# EAGLE board lab2h (EAGLE 9.6.2)
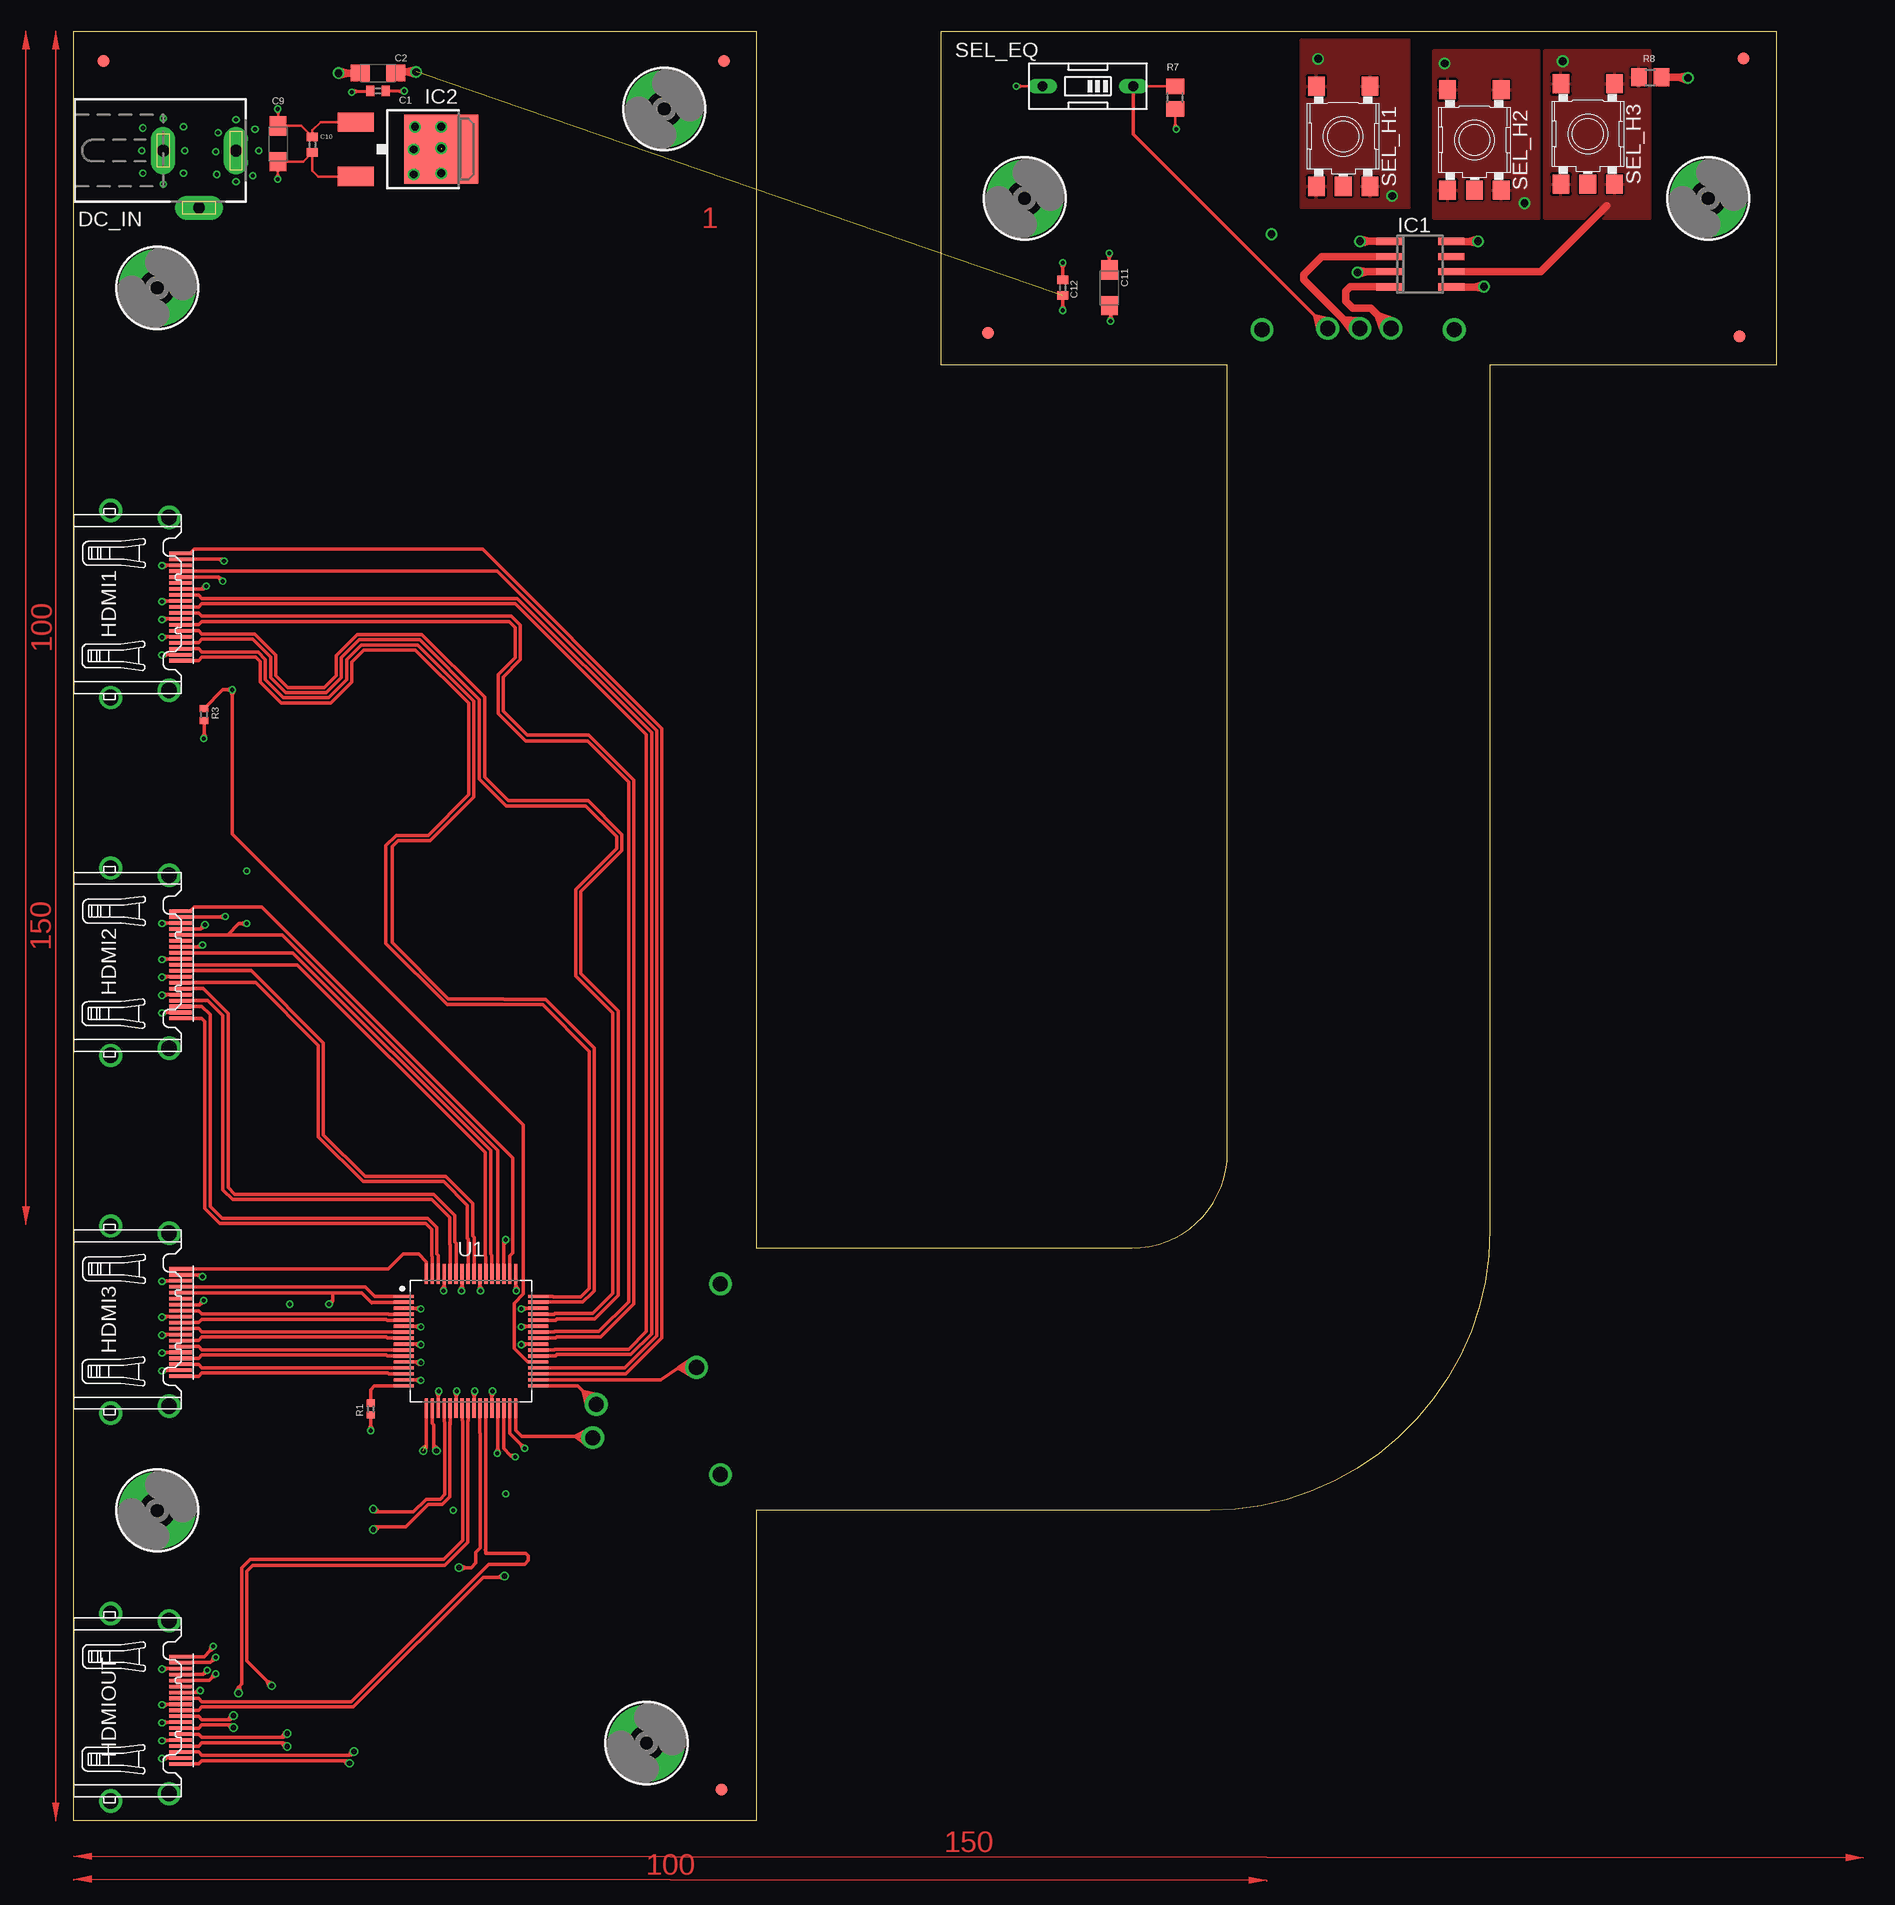
[diagram p0: board, top side]
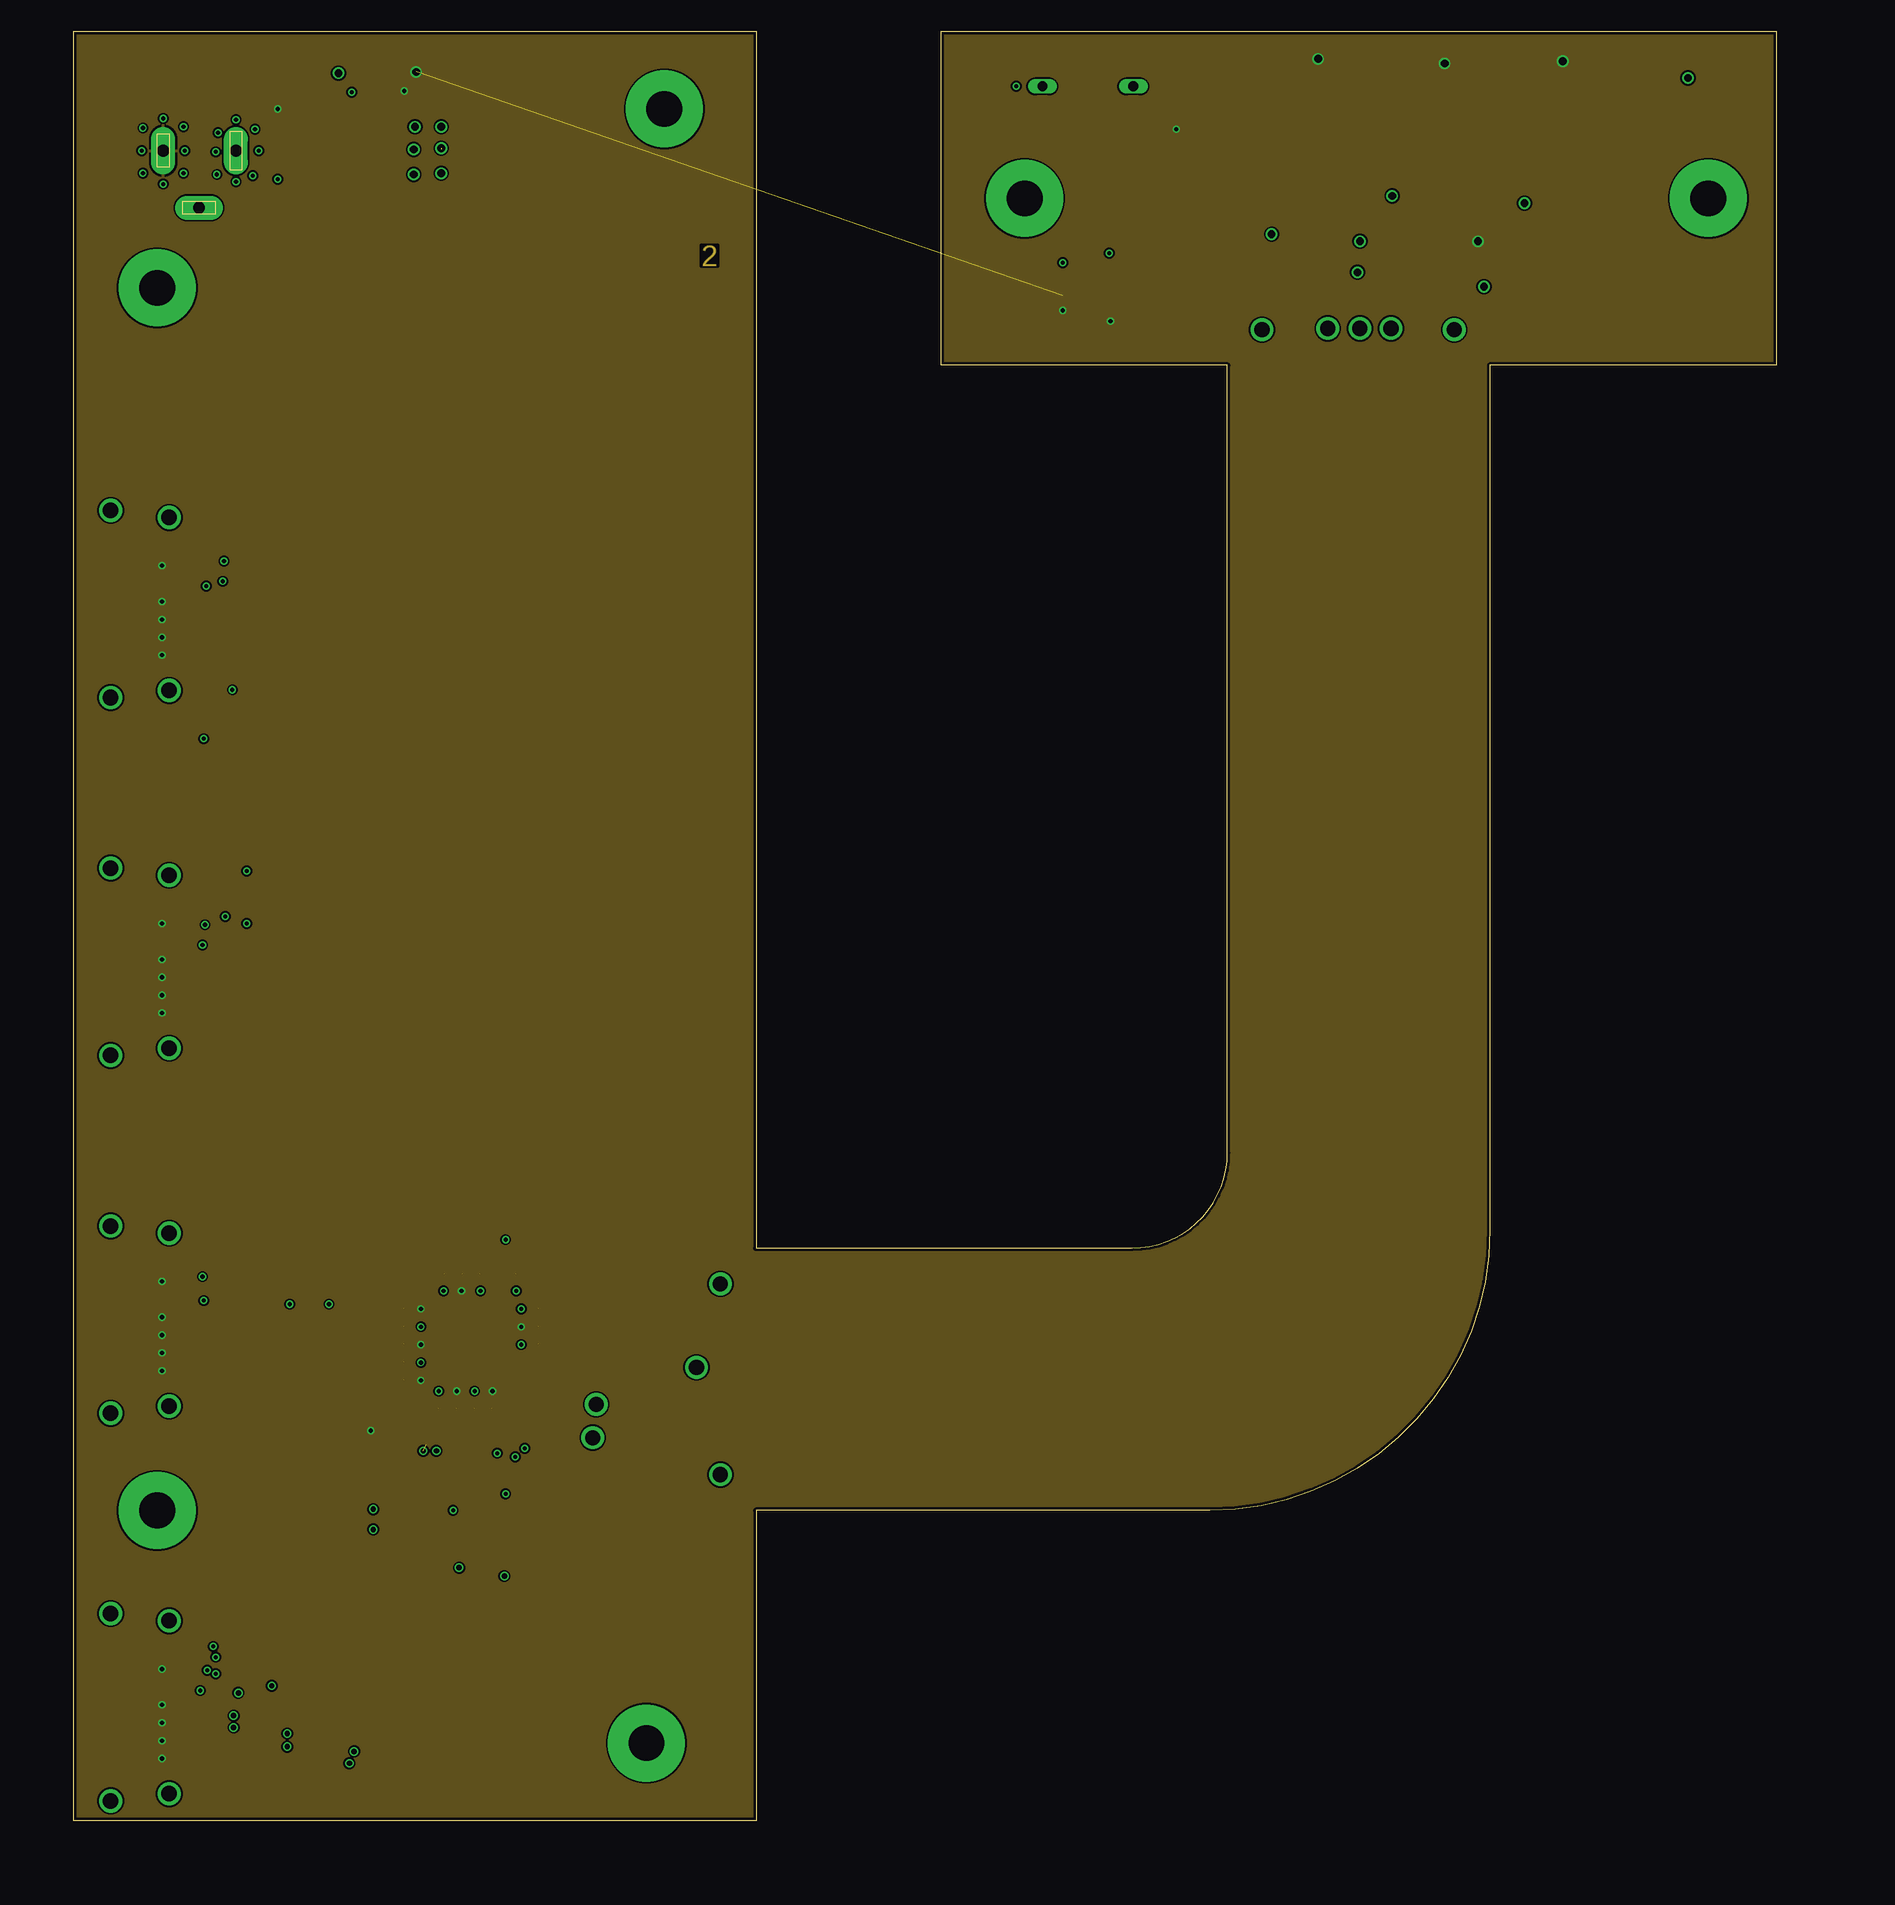
[diagram p1: board, inner layer Route2]
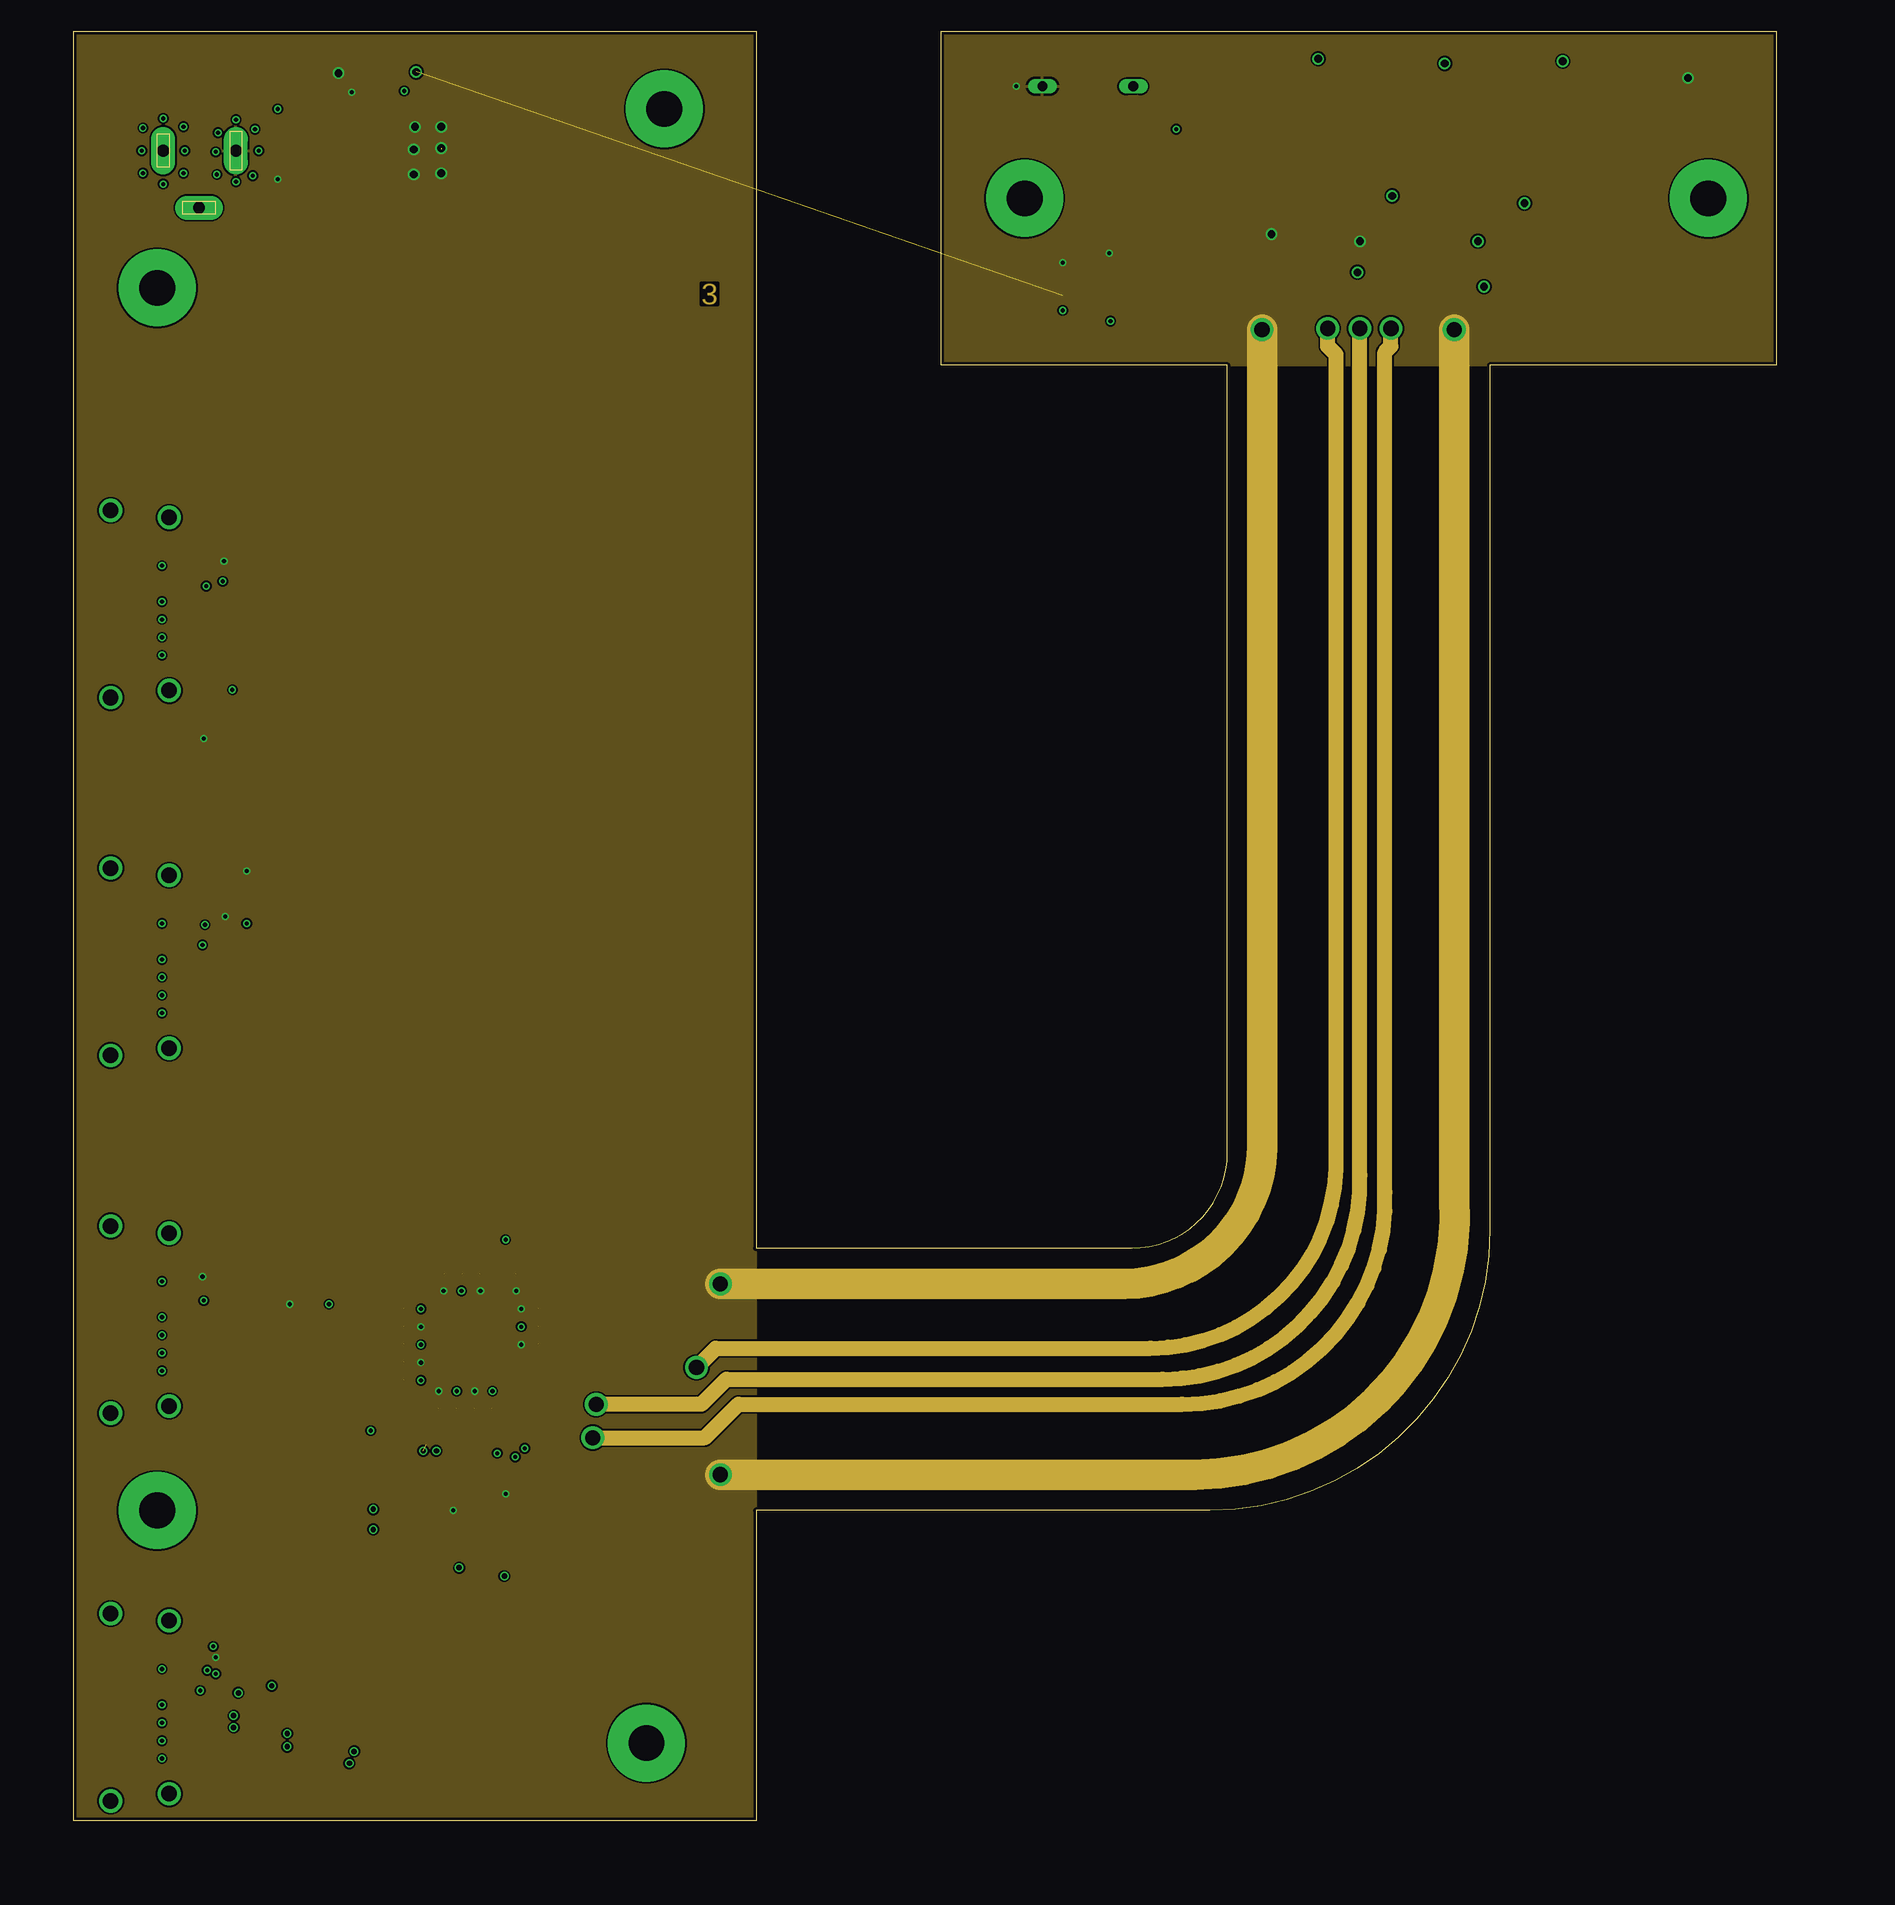
[diagram p2: board, inner layer Route15]
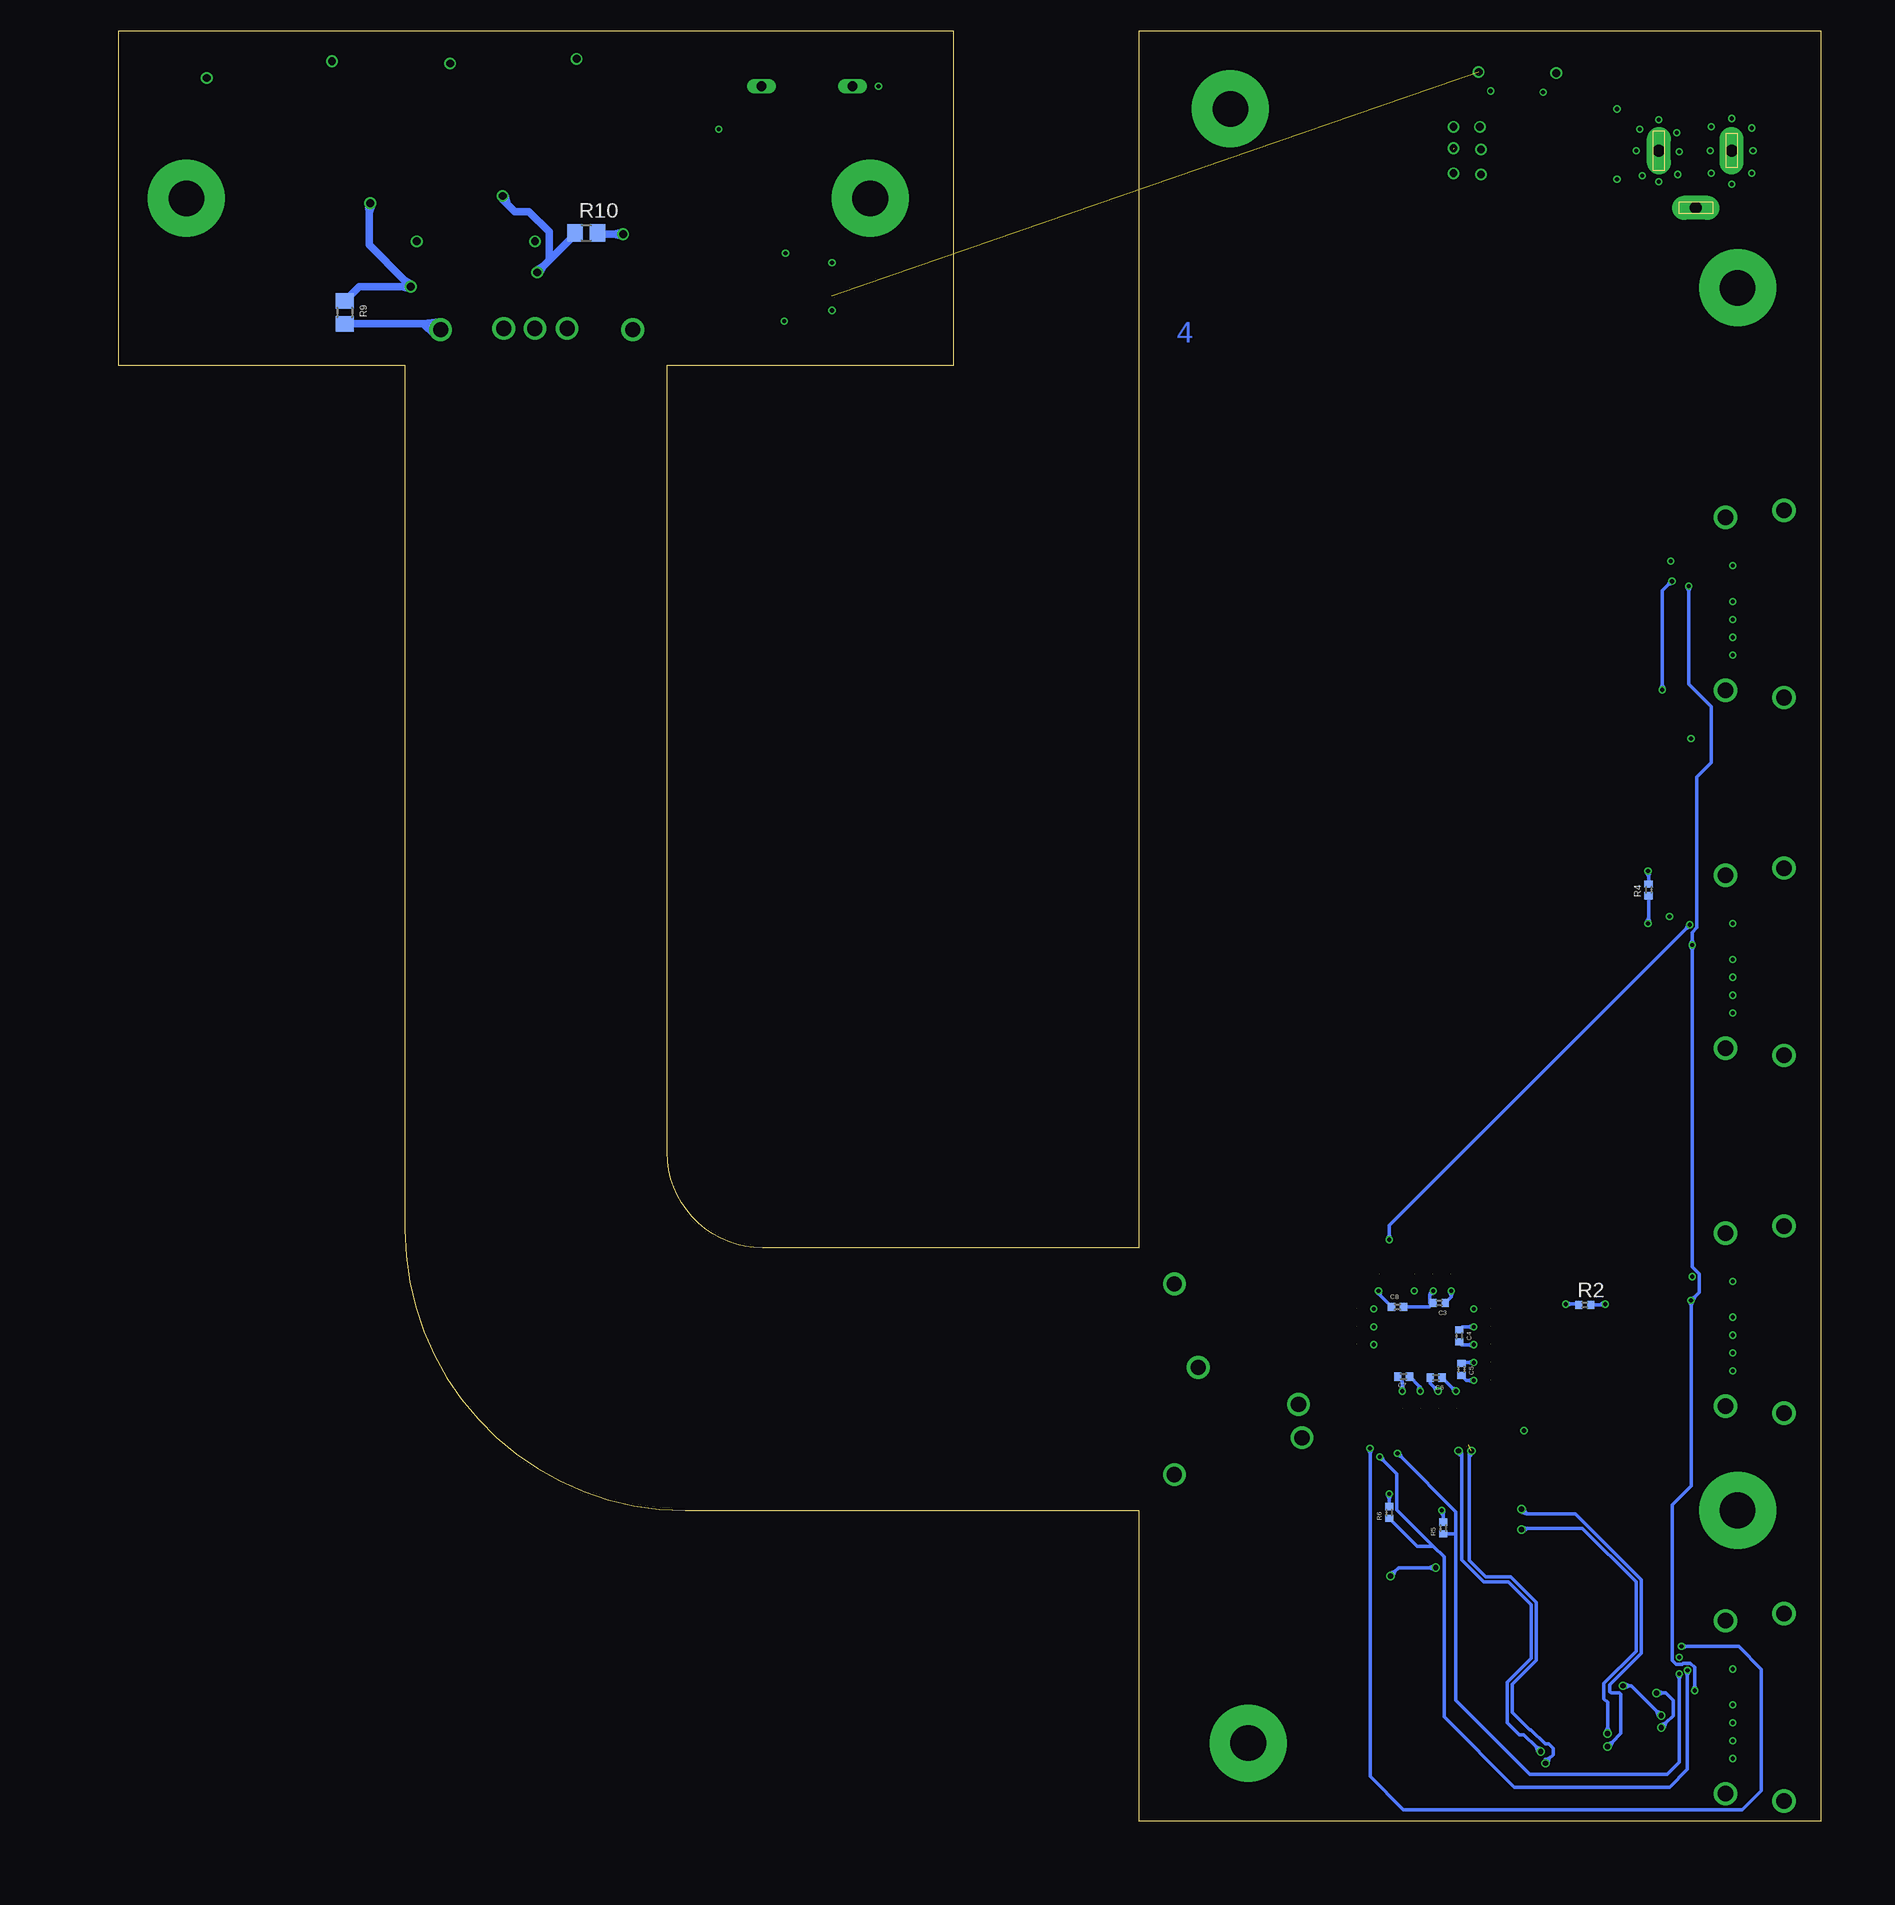
[diagram p3: board, bottom side, seen from below]

Size 142.7 x 150 mm. Coordinates in mm from the lower left corner, seen from the top.
Outline: 0,150 57.2,150 57.2,48 88.7,48 arc90 96.7,56 96.7,122 72.7,122 72.7,150 142.7,150 142.7,122 118.7,122 118.7,49.5 arc-90 95.2,26 57.2,26 57.2,0 0,0 0,150
Copper layers (1+2*15+16): Top 0.018mm / dielectric 0.36mm / Route2 0.035mm / dielectric 0.71mm / Route15 0.035mm / dielectric 0.2mm / Bottom 0.018mm
Design rules "4Layer_PClass6 (1) *": minimum track width 0.15mm, minimum drill 0.35mm, track to track 0.15mm, track to pad 0.15mm, pad to pad 0.15mm, via to via 0.15mm, smd to smd 0mil, copper to edge 0.25mm, drill to drill 0.35mm, minimum pad ring 0.175mm, minimum via ring 0.125mm, stop-mask expansion 0mil, vias tented up to drill 0.45mm, thermal gap 0.2mm
Net classes: 2 100ohm: width 0.283 mm, clearance 0.15 mm

## Footprints (pad centres in the part's own frame; a part is rotated, then mirrored left to right if it is on the bottom)
C0402 = smd 0.7 x 0.9: 1 -0.65,0; 2 0.65,0
SMC_A = smd 1.6 x 1.4: + -1.5,0; - 1.5,0
0402 = smd 0.6 x 0.7: 1 -0.5,0; 2 0.5,0
DCJ0303 = drill 1 pad 2 long: 1 0,3.1; 2 4.8,0; 3 0,-3
FIDUCIAL_1MM = smd 1 x 1: 1 0,0
HDMI_A = smd 0.3 x 1.9: P$1 4.75,3.95; P$2 4.25,3.95; P$3 3.75,3.95; P$4 3.25,3.95; P$5 2.75,3.95; P$6 2.25,3.95; P$7 1.75,3.95; P$8 1.25,3.95; P$9 0.75,3.95; P$10 0.25,3.95; P$11 -0.25,3.95; P$12 -0.75,3.95; P$13 -1.25,3.95; P$14 -1.75,3.95; P$15 -2.25,3.95; P$16 -2.75,3.95; P$17 -3.25,3.95; P$18 -3.75,3.95; P$19 -4.25,3.95 | drill 1.3: P$20 -7.25,3; P$21 7.25,3; P$22 7.85,-1.9; P$23 -7.85,-1.9
SO-08 = smd 0.6 x 2.2: 1 -1.905,-2.6; 2 -0.635,-2.6; 3 0.635,-2.6; 4 1.905,-2.6; 5 1.905,2.6; 6 0.635,2.6; 7 -0.635,2.6; 8 -1.905,2.6
DPACK = smd 1.6 x 3: 1 -2.28,-4.8; 3 2.28,-4.8 | smd 5.8 x 6.2: 4 0,2.38
R0805 = smd 1.3 x 1.5: 1 -0.95,0; 2 0.95,0
EDG-01 = drill 0.813 long: 1 0,-3.81; 2 0,3.81
SKHMPXE010 = smd 1.6 x 1.4: 1 -4.2,2.25; 2 4.2,2.25; 3 -4.2,-2.25; 4 4.2,-2.25; 5 4.2,0
QFP50P1200X1200X120-64 = smd 1.652 x 0.28: 1 -5.632,3.75; 2 -5.632,3.25; 3 -5.632,2.75; 4 -5.632,2.25; 5 -5.632,1.75; 6 -5.632,1.25; 7 -5.632,0.75; 8 -5.632,0.25; 9 -5.632,-0.25; 10 -5.632,-0.75; 11 -5.632,-1.25; 12 -5.632,-1.75; 13 -5.632,-2.25; 14 -5.632,-2.75; 15 -5.632,-3.25; 16 -5.632,-3.75; 33 5.632,-3.75; 34 5.632,-3.25; 35 5.632,-2.75; 36 5.632,-2.25; 37 5.632,-1.75; 38 5.632,-1.25; 39 5.632,-0.75; 40 5.632,-0.25; 41 5.632,0.25; 42 5.632,0.75; 43 5.632,1.25; 44 5.632,1.75; 45 5.632,2.25; 46 5.632,2.75; 47 5.632,3.25; 48 5.632,3.75 | smd 0.28 x 1.652: 17 -3.75,-5.632; 18 -3.25,-5.632; 19 -2.75,-5.632; 20 -2.25,-5.632; 21 -1.75,-5.632; 22 -1.25,-5.632; 23 -0.75,-5.632; 24 -0.25,-5.632; 25 0.25,-5.632; 26 0.75,-5.632; 27 1.25,-5.632; 28 1.75,-5.632; 29 2.25,-5.632; 30 2.75,-5.632; 31 3.25,-5.632; 32 3.75,-5.632; 49 3.75,5.632; 50 3.25,5.632; 51 2.75,5.632; 52 2.25,5.632; 53 1.75,5.632; 54 1.25,5.632; 55 0.75,5.632; 56 0.25,5.632; 57 -0.25,5.632; 58 -0.75,5.632; 59 -1.25,5.632; 60 -1.75,5.632; 61 -2.25,5.632; 62 -2.75,5.632; 63 -3.25,5.632; 64 -3.75,5.632
MOUNTINGHOLE_3.0_PLATED = drill 3 pad 6.452: P$1 0,0

## Placement (x,y rotation side)
C1  10n  [C0402]  25.5,145 0 top
C2  47u  [SMC_A]  25.5,146.5 0 top
C3  10n  [0402]  32,43.4 180 bottom
C4  10n  [0402]  30.33,40.63 270 bottom
C5  10n  [0402]  30.15,37.83 270 bottom
C6  10n  [0402]  32.27,37.13 180 bottom
C7  10n  [0402]  34.99,37.23 180 bottom
C8  100n  [0402]  35.5,43.07 0 bottom
C9  47u  [SMC_A]  17.13,140.57 90 top
C10  100n  [C0402]  20,140.5 90 top
C11  47u  [SMC_A]  86.8,128.5 270 top
C12  100n  [C0402]  82.9,128.5 270 top
DC_IN  [DCJ0303]  10.5,140 270 top
FID1  FIDUCIAL""  [FIDUCIAL_1MM]  139.94,147.74 0 top
FID2  FIDUCIAL""  [FIDUCIAL_1MM]  139.6,124.44 0 top
FID3  FIDUCIAL""  [FIDUCIAL_1MM]  54.3,2.6 90 top
FID4  FIDUCIAL""  [FIDUCIAL_1MM]  54.5,147.5 0 top
FID5  FIDUCIAL""  [FIDUCIAL_1MM]  2.5,147.5 0 top
FID6  FIDUCIAL""  [FIDUCIAL_1MM]  76.64,124.74 0 top
HDMI1  HDMI-A  [HDMI_A]  5,102 270 top
HDMI2  HDMI-A  [HDMI_A]  5,72 270 top
HDMI3  HDMI-A  [HDMI_A]  5,42 270 top
HDMIOUT  HDMI-A  [HDMI_A]  5,9.5 270 top
IC1  PIC12F675SN  [SO-08]  112.85,130.48 270 top
IC2  LD117ADT-TR  [DPACK]  28.44,140.12 270 top
R1  4k02  [0402]  24.9,34.5 90 top
R2  47k  [0402]  19.81,43.23 0 bottom
R3  47k  [0402]  10.93,92.73 270 top
R4  47k  [0402]  14.45,78.03 90 bottom
R5  4k7  [0402]  31.67,24.53 90 bottom
R6  4k7  [0402]  36.19,25.83 90 bottom
R7  [R0805]  92.31,144.44 90 top
R8  [R0805]  132.13,146.14 0 top
R9  [R0805]  123.75,126.44 270 bottom
R10  [R0805]  103.5,133.1 0 bottom
SEL_EQ  [EDG-01]  85,145.4 90 top
SEL_H1  SKHMPSE010  [SKHMPXE010]  106.4,141.2 270 top
SEL_H2  SKHMPSE010  [SKHMPXE010]  117.4,140.9 270 top
SEL_H3  SKHMPSE010  [SKHMPXE010]  126.9,141.4 270 top
U1  TMDS351TQFP64  [QFP50P1200X1200X120-64]  33.3,40.2 0 top
U$1  MOUNTINGHOLE3.0  [MOUNTINGHOLE_3.0_PLATED]  79.7,136 0 top
U$2  MOUNTINGHOLE3.0  [MOUNTINGHOLE_3.0_PLATED]  137,136 0 top
U$31  MOUNTINGHOLE3.0  [MOUNTINGHOLE_3.0_PLATED]  49.5,143.5 0 top
U$32  MOUNTINGHOLE3.0  [MOUNTINGHOLE_3.0_PLATED]  7,128.5 0 top
U$33  MOUNTINGHOLE3.0  [MOUNTINGHOLE_3.0_PLATED]  7,26 0 top
U$34  MOUNTINGHOLE3.0  [MOUNTINGHOLE_3.0_PLATED]  48,6.5 0 top

## Library data of the parts
C1 C2 C9-C12 = rcl; SPICEPREFIX: C
C3-C8 HDMI1-HDMI3 HDMIOUT R1-R6 U1 = labHDE_rev3
DC_IN = con-jack; OC_FARNELL: unknown; OC_NEWARK: unknown
FID1-FID6 U$1 U$2 U$31-U$34 = microbuilder; BOM: EXCLUDE
IC1 = microchip; MF: MICROCHIP; MPN: PIC12F675-E/SN; OC_FARNELL: 9759026; OC_NEWARK: 92C4341
IC2 = v-reg
R7-R10 = rcl; SPICEPREFIX: R
SEL_EQ = special
SEL_H1-SEL_H3 = switch

## Nets
+5V: C8.1 C9.+ C10.1 DC_IN.1 HDMI1.P$18 HDMI2.P$18 HDMI3.P$18 HDMIOUT.P$18 IC2.3 R2.2 R3.2 R4.2 U1.49
CEC: HDMI1.P$13 HDMI2.P$13 HDMI3.P$13 HDMIOUT.P$13
CLOCK_1_N [100ohm]: HDMI1.P$12 U1.38
CLOCK_1_P [100ohm]: HDMI1.P$10 U1.39
CLOCK_2_N [100ohm]: HDMI2.P$12 U1.53
CLOCK_2_P [100ohm]: HDMI2.P$10 U1.54
CLOCK_3_N [100ohm]: HDMI3.P$12 U1.4
CLOCK_3_P [100ohm]: HDMI3.P$10 U1.5
CLOCK_OUT_N [100ohm]: HDMIOUT.P$12 U1.27
CLOCK_OUT_P [100ohm]: HDMIOUT.P$10 U1.26
DATA0_1_N [100ohm]: HDMI1.P$9 U1.41
DATA0_1_P [100ohm]: HDMI1.P$7 U1.42
DATA0_2_N [100ohm]: HDMI2.P$9 U1.56
DATA0_2_P [100ohm]: HDMI2.P$7 U1.57
DATA0_3_N [100ohm]: HDMI3.P$9 U1.7
DATA0_3_P [100ohm]: HDMI3.P$7 U1.8
DATA0_OUT_N [100ohm]: HDMIOUT.P$9 U1.24
DATA0_OUT_P [100ohm]: HDMIOUT.P$7 U1.23
DATA1_1_N [100ohm]: HDMI1.P$6 U1.44
DATA1_1_P [100ohm]: HDMI1.P$4 U1.45
DATA1_2_N [100ohm]: HDMI2.P$6 U1.59
DATA1_2_P [100ohm]: HDMI2.P$4 U1.60
DATA1_3_N [100ohm]: HDMI3.P$6 U1.10
DATA1_3_P [100ohm]: HDMI3.P$4 U1.11
DATA1_OUT_N [100ohm]: HDMIOUT.P$6 U1.21
DATA1_OUT_P [100ohm]: HDMIOUT.P$4 U1.20
DATA2_1_N [100ohm]: HDMI1.P$3 U1.47
DATA2_1_P [100ohm]: HDMI1.P$1 U1.48
DATA2_2_N [100ohm]: HDMI2.P$3 U1.62
DATA2_2_P [100ohm]: HDMI2.P$1 U1.63
DATA2_3_N [100ohm]: HDMI3.P$3 U1.13
DATA2_3_P [100ohm]: HDMI3.P$1 U1.14
DATA2_OUT_N [100ohm]: HDMIOUT.P$3 U1.18
DATA2_OUT_P [100ohm]: HDMIOUT.P$1 U1.17
EQ: R7.2 SEL_EQ.1 U1.34
GND: C1.2 C2.- C3.2 C4.2 C5.2 C6.2 C7.2 C8.2 C9.- C10.2 C11.- C12.2 DC_IN.3 HDMI1.P$2 HDMI1.P$5 HDMI1.P$8 HDMI1.P$11 HDMI1.P$17 HDMI2.P$2 HDMI2.P$5 HDMI2.P$8 HDMI2.P$11 HDMI2.P$17 HDMI3.P$2 HDMI3.P$5 HDMI3.P$8 HDMI3.P$11 HDMI3.P$17 HDMIOUT.P$2 HDMIOUT.P$5 HDMIOUT.P$8 HDMIOUT.P$11 HDMIOUT.P$17 IC1.8 IC2.1 R1.1 R7.1 SEL_H1.3 SEL_H1.4 SEL_H2.3 SEL_H2.4 SEL_H3.3 SEL_H3.4 U1.3 U1.9 U1.15 U1.22 U1.28 U1.43 U1.58
N$25: HDMI3.P$19 U1.64
N$26: HDMI2.P$19 U1.50
N$27: HDMI1.P$19 U1.35
N$36: HDMIOUT.P$19 U1.31
N$37: HDMI3.P$16 U1.1
N$38: HDMI3.P$15 R2.1 U1.2
N$39: HDMI2.P$16 U1.51
N$40: HDMI2.P$15 R4.1 U1.52
N$41: HDMI1.P$15 R3.1 U1.37
N$42: HDMI1.P$16 U1.36
N$43: HDMIOUT.P$16 R6.1 U1.30
N$44: HDMIOUT.P$15 R5.1 U1.29
N$45: R1.2 U1.16
N$50: IC1.6 R8.1 SEL_H3.1 SEL_H3.2
N$51: IC1.5 R9.1 SEL_H2.1 SEL_H2.2
N$52: IC1.3 R10.1 SEL_H1.1 SEL_H1.2
S1: IC1.4 U1.32
S2: IC1.2 U1.33
VCC: C1.1 C2.+ C3.1 C4.1 C5.1 C6.1 C7.1 C11.+ C12.1 IC1.1 IC2.4 R5.2 R6.2 R8.2 R9.2 R10.2 SEL_EQ.2 U1.6 U1.12 U1.19 U1.25 U1.40 U1.46 U1.55 U1.61

## Tracks (layer width: path | path; a pad name or v marks a point on that pad's centre or on a via)
+5V  (via drill 0.35)  (1 unrouted)
  Top 0.203: IC2.3 23.6,137.8 20.5,137.8 20,138.3 C10.1 19.22,139.07 C9.+ 17.1,139.04 17.1,138.02 | v17.1,137.6 17.1,138.02 | 17.1,138.02 16.93,137.69 v17.1,137.6 | 17.1,138.02 17.27,137.69 v17.1,137.6
  Top 0.283: U1.49 37.05,44.82 | 37.05,44.82 37.05,44.45 v37.1,44.4 | HDMI3.P$18 10.41,45.75 | 10.41,45.75 10.65,45.75 v10.8,45.6 | HDMIOUT.P$18 11.45,13.25 11.6,13.4 | 11.6,13.4 v11.9,13.7 | HDMI2.P$18 12.28,75.75 | 12.28,75.75 12.65,75.75 v12.7,75.8 | HDMI1.P$18 12.21,105.75 | 12.21,105.75 12.45,105.75 v12.6,105.6 | v10.9,90.7 10.93,90.73 10.93,91.12 | R3.2 10.93,91.12 | 37.05,44.82 36.95,44.44 v37.1,44.4 | 37.05,44.82 37.24,44.48 v37.1,44.4 | 10.41,45.75 10.69,45.48 v10.8,45.6 | 10.41,45.75 10.8,45.76 v10.8,45.6 | 11.6,13.4 11.96,13.55 v11.9,13.7 | 11.6,13.4 11.75,13.76 v11.9,13.7 | 12.28,75.75 12.66,75.65 v12.7,75.8 | 12.28,75.75 12.62,75.94 v12.7,75.8 | 12.21,105.75 12.49,105.48 v12.6,105.6 | 12.21,105.75 12.6,105.76 v12.6,105.6 | 10.93,91.12 10.76,90.77 v10.9,90.7 | 10.93,91.12 11.05,90.75 v10.9,90.7
  Bottom 0.283: v37.1,44.4 37.1,44.17 36.94,44.01 | 36.94,44.01 C8.1 | R2.2 18.51,43.23 | 18.51,43.23 18.17,43.23 v18.1,43.3 | R4.2 14.45,79.18 | 14.45,79.18 14.45,79.55 v14.5,79.6 | 36.94,44.01 37.21,44.29 v37.1,44.4 | 36.94,44.01 36.94,44.4 v37.1,44.4 | 18.51,43.23 18.18,43.44 v18.1,43.3 | 18.51,43.23 18.14,43.15 v18.1,43.3 | 14.45,79.18 14.64,79.52 v14.5,79.6 | 14.45,79.18 14.35,79.56 v14.5,79.6
  pour Route15: 0,150 0,0 57.2,0 57.2,150
CEC  (via drill 0.35)
  Top 0.283: HDMI1.P$13 10.76,103.25 | 10.76,103.25 10.85,103.25 v11.1,103.5 | HDMI2.P$13 10.41,73.25 | 10.41,73.25 10.65,73.25 v10.8,73.4 | HDMI3.P$13 10.55,43.25 10.6,43.3 | 10.6,43.3 v10.9,43.6 | HDMIOUT.P$13 10.21,10.75 | 10.21,10.75 10.45,10.75 v10.6,10.9 | 10.21,10.75 10.6,10.74 v10.6,10.9 | 10.21,10.75 10.49,11.02 v10.6,10.9 | 10.6,43.3 10.96,43.45 v10.9,43.6 | 10.6,43.3 10.75,43.66 v10.9,43.6 | 10.41,73.25 10.8,73.24 v10.8,73.4 | 10.41,73.25 10.69,73.52 v10.8,73.4 | 10.76,103.25 11.14,103.35 v11.1,103.5 | 10.76,103.25 10.96,103.58 v11.1,103.5
  Bottom 0.283: 10.9,43.18 10.9,28.05 12.49,26.46 12.49,13.46 12.14,13.11 11.65,13.11 11.57,13.19 10.96,13.19 10.6,12.84 10.6,11.32 | 10.9,43.18 v10.9,43.6 | v10.6,10.9 10.6,11.32 | 10.8,72.98 10.8,46.44 10.21,45.84 10.21,44.29 10.6,43.9 | 10.8,72.98 v10.8,73.4 | v10.9,43.6 10.6,43.9 | v10.8,73.4 10.8,73.82 | 10.8,73.82 10.8,74.46 10.41,74.86 10.41,87.49 9.2,88.7 9.2,93.4 11.1,95.3 11.1,103.08 | v11.1,103.5 11.1,103.08 | 10.6,11.32 10.45,10.96 v10.6,10.9 | 10.6,11.32 10.75,10.96 v10.6,10.9 | 10.9,43.18 11.05,43.54 v10.9,43.6 | 10.9,43.18 10.75,43.54 v10.9,43.6 | 10.6,43.9 10.75,43.54 v10.9,43.6 | 10.6,43.9 10.96,43.75 v10.9,43.6 | 10.8,72.98 10.95,73.34 v10.8,73.4 | 10.8,72.98 10.65,73.34 v10.8,73.4 | 10.8,73.82 10.65,73.46 v10.8,73.4 | 10.8,73.82 10.95,73.46 v10.8,73.4 | 11.1,103.08 11.25,103.44 v11.1,103.5 | 11.1,103.08 10.95,103.44 v11.1,103.5
CLOCK_1_N
  Top 0.283: HDMI1.P$12 10.47,102.75 10.75,102.47 37.18,102.47 48.43,91.21 48.43,40.82 46.68,39.07 40.5,39.07 40.38,38.95 U1.38
CLOCK_1_P
  Top 0.283: HDMI1.P$10 10.47,101.75 10.75,102.03 37,102.03 48,91.03 48,41 46.5,39.5 40.32,39.5 40.27,39.45 U1.39
CLOCK_2_N
  Top 0.283: HDMI2.P$12 18.36,72.75 34.93,56.18 34.93,47.5 35.05,47.38 U1.53
CLOCK_2_P
  Top 0.283: HDMI2.P$10 18.75,71.75 34.5,56 34.5,47.32 34.55,47.27 U1.54
CLOCK_3_N
  Top 0.283: HDMI3.P$12 10.47,42.75 10.75,42.47 26.38,42.47 26.4,42.45 U1.4
CLOCK_3_P
  Top 0.283: HDMI3.P$10 10.47,41.75 10.75,42.03 26.2,42.03 26.28,41.95 U1.5
CLOCK_OUT_N
  Top 0.283: HDMIOUT.P$12 10.47,10.25 10.75,9.97 23.27,9.97 34.8,21.5 37.8,21.5 38.1,21.8 38.1,22.2 37.89,22.41 34.52,22.41 34.52,22.71 | U1.27 34.55,32.89 34.52,32.85 34.52,22.71 | 34.51,22.7 34.52,22.71
CLOCK_OUT_P  (via drill 0.45)
  Top 0.283: HDMIOUT.P$10 10.47,9.25 10.75,9.53 23.45,9.53 34.31,20.39 35.57,20.39 | 35.57,20.39 35.99,20.39 v36.1,20.5 | v32.3,21.2 32.84,21.2 | 32.84,21.2 33.3,21.2 33.7,21.6 33.7,22.5 34.08,22.89 34.08,32.48 34.05,32.51 U1.26 | 35.57,20.39 36.06,20.3 v36.1,20.5 | 35.57,20.39 35.98,20.67 v36.1,20.5 | 32.84,21.2 32.38,21.39 v32.3,21.2 | 32.84,21.2 32.38,21.01 v32.3,21.2
  Bottom 0.283: 35.72,20.88 35.4,21.2 32.84,21.2 | 35.72,20.88 v36.1,20.5 | v32.3,21.2 32.84,21.2 | 35.72,20.88 35.91,20.42 v36.1,20.5 | 35.72,20.88 36.18,20.69 v36.1,20.5 | 32.84,21.2 32.38,21.39 v32.3,21.2 | 32.84,21.2 32.38,21.01 v32.3,21.2
DATA0_1_N
  Top 0.283: HDMI1.P$9 10.47,101.25 10.75,100.97 36.68,100.97 37.43,100.21 37.43,97.32 36,95.89 36,93 38,91 43.18,91 46.93,87.25 46.93,43.32 44.18,40.57 40.5,40.57 40.38,40.45 U1.41
DATA0_1_P
  Top 0.283: HDMI1.P$7 10.47,100.25 10.75,100.53 36.5,100.53 37,100.03 37,97.5 35.57,96.07 35.57,92.82 37.89,90.5 43.07,90.5 46.5,87.07 46.5,43.5 44,41 40.32,41 40.27,40.95 U1.42
DATA0_2_N
  Top 0.283: HDMI2.P$9 14.86,71.25 20.93,65.18 20.93,57.5 24.43,54 31.18,54 33.43,51.75 33.43,49 33.55,48.88 U1.56
DATA0_2_P
  Top 0.283: HDMI2.P$7 15.25,70.25 20.5,65 20.5,57.32 24.25,53.57 31,53.57 33,51.57 33,48.82 33.05,48.77 U1.57
DATA0_3_N
  Top 0.283: HDMI3.P$9 10.47,41.25 10.75,40.97 26.38,40.97 26.4,40.95 U1.7
DATA0_3_P
  Top 0.283: HDMI3.P$7 10.47,40.25 10.75,40.53 26.2,40.53 26.28,40.45 U1.8
DATA0_OUT_N  (via drill 0.45)
  Top 0.283: HDMIOUT.P$9 10.47,8.75 10.75,8.47 12.97,8.47 | v13.4,8.8 13.07,8.47 12.97,8.47 | U1.24 33.05,33.52 33.03,33.5 33.03,23.32 31.11,21.4 15,21.4 14.52,20.92 14.52,13.38 16.22,11.68 | v16.6,11.3 16.22,11.68 | 12.97,8.47 13.46,8.6 v13.4,8.8 | 12.97,8.47 13.22,8.9 v13.4,8.8 | 16.22,11.68 16.41,11.22 v16.6,11.3 | 16.22,11.68 16.68,11.49 v16.6,11.3
  Bottom 0.283: v13.4,8.8 13.78,9.18 | 13.78,9.18 15.9,11.3 16.06,11.3 | 16.06,11.3 v16.6,11.3 | 13.78,9.18 13.32,8.99 v13.4,8.8 | 13.78,9.18 13.59,8.72 v13.4,8.8 | 16.06,11.3 16.52,11.11 v16.6,11.3 | 16.06,11.3 16.52,11.49 v16.6,11.3
DATA0_OUT_P  (via drill 0.45)
  Top 0.283: HDMIOUT.P$7 10.47,7.75 10.75,8.03 12.91,8.03 | v13.4,7.8 13.17,8.03 12.91,8.03 | U1.23 32.55,33.55 32.6,33.5 32.6,23.5 31,21.9 14.8,21.9 14.08,21.18 14.08,11.46 13.86,11.24 | 13.86,11.24 13.8,11.18 v13.8,10.7 | 12.91,8.03 13.24,7.66 v13.4,7.8 | 12.91,8.03 13.41,8.01 v13.4,7.8 | 13.86,11.24 13.62,10.8 v13.8,10.7 | 13.86,11.24 14,10.76 v13.8,10.7
  Bottom 0.283: v13.4,7.8 13.02,8.18 | 13.02,8.18 12.4,8.8 12.4,10.1 13,10.7 13.26,10.7 | 13.26,10.7 v13.8,10.7 | 13.02,8.18 13.21,7.72 v13.4,7.8 | 13.02,8.18 13.48,7.99 v13.4,7.8 | 13.26,10.7 13.72,10.51 v13.8,10.7 | 13.26,10.7 13.72,10.89 v13.8,10.7
DATA1_1_N
  Top 0.283: HDMI1.P$6 10.47,99.75 10.75,99.47 15.18,99.47 16.93,97.71 16.93,96 17.93,95 21,95 22,96 22,97.68 23.75,99.43 29.18,99.43 34.43,94.18 34.43,87.5 36.43,85.5 43.11,85.5 45.81,82.81 | 45.81,82.81 | 45.81,82.81 45.93,82.68 45.93,81.32 45.81,81.19 | 45.81,81.19 | 45.5,68 42.5,71 42.5,77.89 45.81,81.19 | 45.5,68 | 45.5,68 45.63,67.87 45.63,44.01 45.5,43.89 | 45.5,43.89 | 45.5,43.89 43.68,42.07 40.5,42.07 40.38,41.95 U1.44
DATA1_1_P
  Top 0.283: HDMI1.P$4 10.47,98.75 10.75,99.03 15,99.03 16.5,97.53 16.5,95.82 17.75,94.57 21.18,94.57 22.43,95.82 22.43,97.5 23.93,99 29,99 34,94 34,87.32 36.25,85.07 42.93,85.07 45.5,82.5 45.5,81.5 42.07,78.07 42.07,70.82 45.19,67.69 45.19,44.19 43.5,42.5 40.32,42.5 40.27,42.45 U1.45
DATA1_2_N
  Top 0.283: HDMI2.P$6 10.86,69.75 12.93,67.68 12.93,53.07 13.5,52.5 30.18,52.5 31.93,50.75 31.93,48.5 32.05,48.38 U1.59
DATA1_2_P
  Top 0.283: HDMI2.P$4 11.25,68.75 12.5,67.5 12.5,54.07 12.5,52.89 13.32,52.07 30,52.07 31.5,50.57 31.5,48.32 31.55,48.27 U1.60
DATA1_3_N
  Top 0.283: HDMI3.P$6 10.47,39.75 10.75,39.47 26.38,39.47 26.4,39.45 U1.10
DATA1_3_P
  Top 0.283: HDMI3.P$4 10.47,38.75 10.75,39.03 26.2,39.03 26.28,38.95 U1.11
DATA1_OUT_N  (via drill 0.45)
  Top 0.283: HDMIOUT.P$6 10.47,7.25 10.75,6.97 17.48,6.97 | v17.9,7.3 17.57,6.97 17.48,6.97 | v25.1,24.4 25.33,24.63 25.59,24.63 | 31.53,33.2 31.53,27.15 30.88,26.5 29.71,26.5 27.85,24.63 25.59,24.63 | 31.53,33.2 31.53,33.4 | 31.53,33.2 31.55,33.22 U1.21 | 17.48,6.97 17.95,7.1 v17.9,7.3 | 17.48,6.97 17.72,7.4 v17.9,7.3 | 25.59,24.63 25.09,24.61 v25.1,24.4 | 25.59,24.63 25.26,24.26 v25.1,24.4
  Bottom 0.283: v17.9,7.3 17.9,7.84 | 17.9,7.84 17.9,9.9 18.2,10.2 18.2,11.51 15.51,14.21 15.51,20.01 20,24.5 24.57,24.5 | v25.1,24.4 25,24.5 24.57,24.5 | 17.9,7.84 17.71,7.38 v17.9,7.3 | 17.9,7.84 18.09,7.38 v17.9,7.3 | 24.57,24.5 24.98,24.23 v25.1,24.4 | 24.57,24.5 25.06,24.6 v25.1,24.4
DATA1_OUT_P  (via drill 0.45)
  Top 0.283: HDMIOUT.P$4 10.47,6.25 10.75,6.53 17.48,6.53 | v17.9,6.2 17.57,6.53 17.48,6.53 | v25.1,26.1 25.33,25.87 25.59,25.87 | 25.59,25.87 28.47,25.87 29.53,26.93 30.7,26.93 31.1,27.33 31.1,33.4 31.05,33.45 U1.20 | 17.48,6.53 17.72,6.1 v17.9,6.2 | 17.48,6.53 17.95,6.4 v17.9,6.2 | 25.59,25.87 25.26,26.24 v25.1,26.1 | 25.59,25.87 25.09,25.89 v25.1,26.1
  Bottom 0.283: v25.1,26.1 24.84,25.84 24.83,25.84 24.73,25.73 24.7,25.73 | 24.7,25.73 20.62,25.73 15.2,20.31 | v17.9,6.2 17.52,6.58 | 17.52,6.58 16.8,7.3 16.8,10.6 16.9,10.7 17.6,10.7 17.7,10.8 17.7,11.4 15.2,13.9 | 15.2,13.9 | 15.2,13.9 15.07,14.03 15.07,20.19 15.2,20.31 | 15.2,20.31 | 17.52,6.58 17.71,6.12 v17.9,6.2 | 17.52,6.58 17.98,6.39 v17.9,6.2 | 24.7,25.73 25.17,25.9 v25.1,26.1 | 24.7,25.73 24.91,26.19 v25.1,26.1
DATA2_1_N
  Top 0.283: HDMI1.P$3 10.47,98.25 10.75,97.97 15.46,97.97 16.07,97.35 16.07,95.64 17.57,94.13 21.36,94.13 22.87,95.64 22.87,97.32 24.11,98.57 28.82,98.57 33.53,93.86 33.53,85.82 29.88,82.17 27.2,82.17 26.7,81.67 26.7,73.6 31.4,68.9 36,68.9 36.07,68.83 39.58,68.83 43.63,64.78 43.63,44.42 43.41,44.19 | 43.41,44.19 | 43.41,44.19 42.68,43.47 38.95,43.47 U1.47
DATA2_1_P
  Top 0.283: HDMI1.P$1 10.47,97.25 10.75,97.53 15.28,97.53 15.63,97.17 15.63,95.46 17.39,93.7 21.54,93.7 23.3,95.46 23.3,97.14 24.29,98.13 28.64,98.13 33.1,93.67 33.1,86 29.7,82.6 27.02,82.6 26.17,81.75 26.17,73.52 31.29,68.4 39.3,68.4 43.2,64.5 43.2,44.6 42.5,43.9 40.2,43.9 40.15,43.95 U1.48
DATA2_2_N
  Top 0.283: U1.62 30.55,47.38 30.43,47.5 30.43,49.75 29.68,50.5 12.43,50.5 11.43,51.5 11.43,67.57 10.75,68.25 HDMI2.P$3
DATA2_2_P
  Top 0.283: U1.63 30.05,47.27 30,47.32 30,49.57 29.5,50.07 12.25,50.07 11,51.32 11,67 10.75,67.25 HDMI2.P$1
DATA2_3_N
  Top 0.283: HDMI3.P$3 10.47,38.25 10.75,37.97 26.48,37.97 26.5,37.95 U1.13
DATA2_3_P
  Top 0.283: HDMI3.P$1 10.47,37.25 10.75,37.53 26.3,37.53 26.38,37.45 U1.14
DATA2_OUT_N  (via drill 0.45)
  Top 0.283: HDMIOUT.P$3 10.47,5.75 10.75,5.47 23.07,5.47 | v30.4,31 30.17,31.23 30.17,31.49 | U1.18 30.05,33.3 30.17,33.18 30.17,31.49 | 23.07,5.47 23.55,5.6 v23.5,5.8 23.32,5.9 23.07,5.47 | 30.17,31.49 30.19,30.99 v30.4,31 | 30.17,31.49 30.54,31.16 v30.4,31
  Bottom 0.283: v23.5,5.8 23.88,6.18 | 23.88,6.18 24.9,7.2 25.3,7.2 26.3,8.2 26.3,11.61 24.3,13.61 24.3,18.1 26.2,20 28.28,20 30.13,21.85 30.13,30.53 | v30.4,31 30.14,30.74 30.14,30.73 30.13,30.73 30.13,30.53 | 23.88,6.18 23.42,5.99 v23.5,5.8 | 23.88,6.18 23.69,5.72 v23.5,5.8 | 30.13,30.53 30.53,30.84 v30.4,31 | 30.13,30.53 30.19,31.02 v30.4,31
DATA2_OUT_P  (via drill 0.45)  (1 unrouted)
  Top 0.283: HDMIOUT.P$1 10.47,4.75 10.75,5.03 22.61,5.03 | v23.1,4.8 22.87,5.03 22.61,5.03 | v29.3,31 29.53,31.23 29.53,31.49 | 29.55,31.49 U1.17 | 22.61,5.03 22.94,4.66 v23.1,4.8 | 22.61,5.03 23.11,5.01 v23.1,4.8 | 29.53,31.49 29.16,31.16 v29.3,31 | 29.53,31.49 29.51,30.99 v29.3,31
  Bottom 0.283: v23.1,4.8 23.1,5.16 22.83,5.16 22.77,5.22 | 22.77,5.22 22.46,5.53 22.46,6.07 22.83,6.44 23.13,6.44 24.32,7.63 24.43,7.63 25.87,9.07 25.87,11.43 23.87,13.43 23.87,18.28 26.02,20.43 28.1,20.43 29.5,21.83 29.5,30.5 | v29.3,31 29.5,30.8 29.5,30.5 | 22.77,5.22 22.9,4.75 v23.1,4.8 | 22.77,5.22 23.2,4.98 v23.1,4.8 | 29.5,30.5 29.51,31 v29.3,31 | 29.5,30.5 29.15,30.85 v29.3,31
EQ  (via drill 1.27)
  Top 0.203: R7.2 SEL_EQ.1
  Top 0.283: v52.2,38 52.15,37.95 50.68,37.95 | U1.34 49.2,36.95 50.68,37.95 | v105.1,125.1 104.02,126.18 | 104.02,126.18 88.81,141.39 SEL_EQ.1 | 50.68,37.95 51.79,37.3 v52.2,38 | 50.68,37.95 51.75,38.67 v52.2,38 | 104.02,126.18 104.31,124.92 v105.1,125.1 | 104.02,126.18 105.28,125.89 v105.1,125.1
  Route15 1.27: v52.2,38 53.8,39.6 90.23,39.6 arc93 105.8,56.09 105.8,122.9 105.1,123.6 v105.1,125.1
GND  (via drill 0.35, 0.65)  (8 unrouted)
  Top 0.203: IC2.1 20.7,142.4 20,141.7 C10.2 19.08,142.07 C9.- 17.13,143.08 | 17.13,143.08 17.13,143.47 v17.1,143.5 | R7.1 92.31,142.21 | 92.31,142.21 92.31,141.89 v92.4,141.8 | 17.13,143.08 17.28,143.42 v17.1,143.5 | 17.13,143.08 16.93,143.39 v17.1,143.5 | 92.31,142.21 92.21,141.85 v92.4,141.8 | 92.31,142.21 92.55,141.93 v92.4,141.8
  Top 0.254: v27.7,145 27.28,145 | 27.28,145 C1.2 | 27.28,145 27.63,144.84 v27.7,145 | 27.28,145 27.63,145.16 v27.7,145
  Top 0.283: U1.58 32.55,44.82 | 32.55,44.82 32.55,44.45 v32.5,44.4 | U1.3 28.68,42.95 | 28.68,42.95 29.05,42.95 v29.1,42.9 | U1.9 28.68,39.95 | 28.68,39.95 29.05,39.95 v29.1,39.9 | U1.15 28.68,36.95 | 28.68,36.95 29.05,36.95 v29.1,36.9 | U1.22 32.05,35.58 | 32.05,35.58 32.05,35.95 v32.1,36 | U1.28 35.05,35.58 | 35.05,35.58 35.05,35.95 v35.1,36 | U1.43 37.92,41.45 | 37.92,41.45 37.55,41.45 v37.5,41.4 | R1.1 24.9,33.12 | 24.9,33.12 v24.9,32.7 | HDMIOUT.P$11 7.82,9.75 | 7.82,9.75 7.45,9.75 v7.4,9.7 | HDMIOUT.P$8 7.82,8.25 | 7.82,8.25 7.45,8.25 v7.4,8.2 | HDMIOUT.P$5 7.82,6.75 | 7.82,6.75 7.45,6.75 v7.4,6.7 | HDMIOUT.P$2 7.82,5.25 | 7.82,5.25 7.45,5.25 v7.4,5.2 | HDMIOUT.P$17 7.82,12.75 | 7.82,12.75 7.45,12.75 v7.4,12.7 | HDMI2.P$2 7.82,67.75 | 7.82,67.75 7.45,67.75 v7.4,67.7 | HDMI2.P$5 7.82,69.25 | 7.82,69.25 7.45,69.25 v7.4,69.2 | HDMI2.P$8 7.82,70.75 | 7.82,70.75 7.45,70.75 v7.4,70.7 | HDMI2.P$11 7.82,72.25 | 7.82,72.25 7.45,72.25 v7.4,72.2 | HDMI2.P$17 7.82,75.25 | 7.82,75.25 7.45,75.25 v7.4,75.2 | HDMI1.P$2 7.82,97.75 | 7.82,97.75 7.45,97.75 v7.4,97.7 | HDMI1.P$5 7.82,99.25 | 7.82,99.25 7.45,99.25 v7.4,99.2 | HDMI1.P$8 7.82,100.75 | 7.82,100.75 7.45,100.75 v7.4,100.7 | HDMI1.P$11 7.82,102.25 | 7.82,102.25 7.45,102.25 v7.4,102.2 | HDMI1.P$17 7.82,105.25 | 7.82,105.25 7.45,105.25 v7.4,105.2 | C11.- 86.9,126.9 86.9,126.12 | 86.9,126.12 v86.9,125.7 | C12.2 82.9,127.02 | 82.9,127.02 v82.9,126.6 | 32.55,44.82 32.36,44.48 v32.5,44.4 | 32.55,44.82 32.65,44.44 v32.5,44.4 | 28.68,42.95 29.02,42.76 v29.1,42.9 | 28.68,42.95 29.06,43.05 v29.1,42.9 | 28.68,36.95 29.02,36.76 v29.1,36.9 | 28.68,36.95 29.06,37.05 v29.1,36.9 | 32.05,35.58 32.24,35.92 v32.1,36 | 32.05,35.58 31.95,35.96 v32.1,36
  Top 0.283: 35.05,35.58 35.24,35.92 v35.1,36 | 35.05,35.58 34.95,35.96 v35.1,36 | 37.92,41.45 37.54,41.55 v37.5,41.4 | 37.92,41.45 37.58,41.26 v37.5,41.4 | 28.68,39.95 29.02,39.76 v29.1,39.9 | 28.68,39.95 29.06,40.05 v29.1,39.9 | 24.9,33.12 24.75,32.76 v24.9,32.7 | 24.9,33.12 25.05,32.76 v24.9,32.7 | 7.82,5.25 7.44,5.35 v7.4,5.2 | 7.82,5.25 7.48,5.06 v7.4,5.2 | 7.82,6.75 7.44,6.85 v7.4,6.7 | 7.82,6.75 7.48,6.56 v7.4,6.7 | 7.82,8.25 7.44,8.35 v7.4,8.2 | 7.82,8.25 7.48,8.06 v7.4,8.2 | 7.82,9.75 7.44,9.85 v7.4,9.7 | 7.82,9.75 7.48,9.56 v7.4,9.7 | 7.82,12.75 7.44,12.85 v7.4,12.7 | 7.82,12.75 7.48,12.56 v7.4,12.7 | 7.82,75.25 7.44,75.35 v7.4,75.2 | 7.82,75.25 7.48,75.06 v7.4,75.2 | 7.82,72.25 7.44,72.35 v7.4,72.2 | 7.82,72.25 7.48,72.06 v7.4,72.2 | 7.82,70.75 7.44,70.85 v7.4,70.7 | 7.82,70.75 7.48,70.56 v7.4,70.7 | 7.82,69.25 7.44,69.35 v7.4,69.2 | 7.82,69.25 7.48,69.06 v7.4,69.2 | 7.82,67.75 7.44,67.85 v7.4,67.7 | 7.82,67.75 7.48,67.56 v7.4,67.7 | 7.82,105.25 7.44,105.35 v7.4,105.2 | 7.82,105.25 7.48,105.06 v7.4,105.2 | 7.82,102.25 7.44,102.35 v7.4,102.2 | 7.82,102.25 7.48,102.06 v7.4,102.2 | 7.82,100.75 7.44,100.85 v7.4,100.7 | 7.82,100.75 7.48,100.56 v7.4,100.7 | 7.82,99.25 7.44,99.35 v7.4,99.2 | 7.82,99.25 7.48,99.06 v7.4,99.2 | 7.82,97.75 7.44,97.85 v7.4,97.7 | 7.82,97.75 7.48,97.56 v7.4,97.7 | 82.9,127.02 82.75,126.66 v82.9,126.6 | 82.9,127.02 83.05,126.66 v82.9,126.6 | 86.9,126.12 86.75,125.76 v86.9,125.7 | 86.9,126.12 87.05,125.76 v86.9,125.7
  Top 0.305: HDMI3.P$2 7.82,37.75 | 7.82,37.75 7.45,37.75 v7.4,37.7 | HDMI3.P$5 7.82,39.25 | 7.82,39.25 7.45,39.25 v7.4,39.2 | HDMI3.P$8 7.82,40.75 | 7.82,40.75 7.45,40.75 v7.4,40.7 | HDMI3.P$11 7.82,42.25 | 7.82,42.25 7.45,42.25 v7.4,42.2 | HDMI3.P$17 7.82,45.25 | 7.82,45.25 7.45,45.25 v7.4,45.2 | 7.82,37.75 7.43,37.84 v7.4,37.7 | 7.82,37.75 7.47,37.57 v7.4,37.7 | 7.82,39.25 7.43,39.34 v7.4,39.2 | 7.82,39.25 7.47,39.07 v7.4,39.2 | 7.82,40.75 7.43,40.84 v7.4,40.7 | 7.82,40.75 7.47,40.57 v7.4,40.7 | 7.82,42.25 7.43,42.34 v7.4,42.2 | 7.82,42.25 7.47,42.07 v7.4,42.2 | 7.82,45.25 7.43,45.34 v7.4,45.2 | 7.82,45.25 7.47,45.07 v7.4,45.2
  Top 0.61: IC1.8 116.92,132.38 | 116.92,132.38 117.69,132.38 v117.7,132.4 | SEL_H1.4 104.3,136.85 | SEL_H2.4 115.2,136.65 | C2.- 27.1,146.6 27.92,146.6 | 27.92,146.6 v28.7,146.6 | 116.92,132.38 117.66,132.22 v117.7,132.4 | 116.92,132.38 117.65,132.58 v117.7,132.4 | 27.92,146.6 28.66,146.42 v28.7,146.6 | 27.92,146.6 28.66,146.78 v28.7,146.6
  Bottom 0.283: 32.8,44.1 32.8,43.4 C3.2 32.83,43.07 C8.2 | 32.8,44.1 v32.5,44.4 | C4.2 30.1,39.9 29.52,39.9 | 29.52,39.9 v29.1,39.9 | v29.1,36.9 29.52,36.9 | 29.52,36.9 29.72,36.9 C5.2 | v32.1,36 32.4,36.3 | 32.4,36.3 32.77,36.67 C6.2 | v35.1,36 35.1,36.42 | 35.1,36.42 35.1,36.84 C7.2 | 32.8,44.1 32.65,44.46 v32.5,44.4 | 32.8,44.1 32.44,44.25 v32.5,44.4 | 29.52,36.9 29.16,37.05 v29.1,36.9 | 29.52,36.9 29.16,36.75 v29.1,36.9 | 32.4,36.3 32.04,36.15 v32.1,36 | 32.4,36.3 32.25,35.94 v32.1,36 | 35.1,36.42 34.95,36.06 v35.1,36 | 35.1,36.42 35.25,36.06 v35.1,36 | 29.52,39.9 29.16,40.05 v29.1,39.9 | 29.52,39.9 29.16,39.75 v29.1,39.9
  other vias: 104.3,147.7 124.8,147.5 114.9,147.3
  pour Route2: 0,0 0,150 57.2,150 57.2,0
  pour Route2: 72.7,150 72.7,122 142.7,122 142.7,150
  pour Route2: 57.1,26 95.2,26 arc90 118.7,49.5 118.7,122 96.6,122 96.6,55.8 arc-90 88.8,48 57.1,48
  pour Top: 111.9,135.2 102.9,135.2 102.9,149.3 111.9,149.3
  pour Top: 132.1,134.3 123.3,134.3 123.3,148.4 132.1,148.4
  pour Top: 122.8,134.3 114,134.3 114,148.4 122.8,148.4
N$1  (via drill 0.35)
  other vias: 9.3,140
N$2  (via drill 0.35)
  other vias: 7.5,142.7
N$3  (via drill 0.35)
  other vias: 5.7,140
N$4  (via drill 0.35)
  other vias: 7.5,137.2
N$5  (via drill 0.35)
  other vias: 9.2,138.1
N$6  (via drill 0.35)
  other vias: 5.8,138.1
N$7  (via drill 0.35)
  other vias: 5.8,141.9
N$8  (via drill 0.35)
  other vias: 9.2,142
N$9  (via drill 0.35)
  other vias: 11.9,139.9
N$10  (via drill 0.35)
  other vias: 12.1,141.5
N$11  (via drill 0.35)
  other vias: 13.6,142.6
N$12  (via drill 0.35)
  other vias: 15.2,141.8
N$13  (via drill 0.35)
  other vias: 15.5,140
N$14  (via drill 0.35)
  other vias: 15,137.9
N$15  (via drill 0.35)
  other vias: 13.6,137.4
N$16  (via drill 0.35)
  other vias: 12,138
N$25
  Top 0.283: HDMI3.P$19 26.35,46.25 27.6,47.5 28.9,47.5 29.55,46.85 U1.64
N$26
  Top 0.283: HDMI2.P$19 9.75,76.25 10.09,76.59 15.75,76.59 36.55,55.79 36.79,55.55 36.79,47.58 36.55,47.33 U1.50
N$27
  Top 0.283: HDMI1.P$19 9.75,106.25 10.09,106.59 34.28,106.59 49.3,91.57 49.3,40.46 46.29,37.45 U1.35
N$36  (via drill 0.35)
  Top 0.283: HDMIOUT.P$19 10.95,13.75 11.46,14.26 | v11.7,14.6 11.7,14.5 11.46,14.26 | v37.8,31.2 37.5,31.5 | 37.5,31.5 36.55,32.45 U1.31 | 11.46,14.26 11.79,14.47 v11.7,14.6 | 11.46,14.26 11.55,14.64 v11.7,14.6 | 37.5,31.5 37.65,31.14 v37.8,31.2 | 37.5,31.5 37.86,31.35 v37.8,31.2
  Bottom 0.283: v11.7,14.6 11.28,14.6 | 11.28,14.6 6.9,14.6 5,12.7 5,2.5 6.6,0.9 35,0.9 37.8,3.7 37.8,30.78 | 37.8,30.78 v37.8,31.2 | 11.28,14.6 11.64,14.45 v11.7,14.6 | 11.28,14.6 11.64,14.75 v11.7,14.6 | 37.8,30.78 37.95,31.14 v37.8,31.2 | 37.8,30.78 37.65,31.14 v37.8,31.2
N$37
  Top 0.283: HDMI3.P$16 24.45,44.75 25.25,43.95 U1.1
N$38  (via drill 0.35)
  Top 0.283: HDMI3.P$15 21.7,44.25 | 21.7,44.25 24.15,44.25 25,43.4 25.05,43.45 U1.2 | 21.7,44.25 21.7,43.6 | 21.7,43.6 v21.4,43.3 | 21.7,43.6 21.34,43.45 v21.4,43.3 | 21.7,43.6 21.55,43.24 v21.4,43.3
  Bottom 0.283: R2.1 20.38,43.3 20.98,43.3 | 20.98,43.3 v21.4,43.3 | 20.98,43.3 21.34,43.15 v21.4,43.3 | 20.98,43.3 21.34,43.45 v21.4,43.3
N$39  (via drill 0.35)
  Top 0.283: HDMI2.P$16 10.65,74.75 10.7,74.8 | 10.7,74.8 v11,75.1 | v36.2,48.7 36.05,48.55 36.05,48.31 | 36.05,48.31 U1.51 | 36.05,48.31 36.32,48.59 v36.2,48.7 | 36.05,48.31 36.04,48.7 v36.2,48.7 | 10.7,74.8 11.06,74.95 v11,75.1 | 10.7,74.8 10.85,75.16 v11,75.1
  Bottom 0.283: v11,75.1 11.3,74.8 | 11.3,74.8 36.2,49.9 36.2,49.12 | 36.2,49.12 v36.2,48.7 | 36.2,49.12 36.05,48.76 v36.2,48.7 | 36.2,49.12 36.35,48.76 v36.2,48.7 | 11.3,74.8 11.15,75.16 v11,75.1 | 11.3,74.8 10.94,74.95 v11,75.1
N$40  (via drill 0.35)
  Top 0.283: U1.52 35.55,56.17 17.48,74.25 12.9,74.25 | 12.9,74.25 HDMI2.P$15 | 12.9,74.25 13.85,75.2 14.08,75.2 | 14.08,75.2 v14.5,75.2 | 14.08,75.2 14.44,75.05 v14.5,75.2 | 14.08,75.2 14.44,75.35 v14.5,75.2
  Bottom 0.283: v14.5,75.2 14.45,75.25 14.45,75.62 | 14.45,75.62 R4.1 | 14.45,75.62 14.35,75.24 v14.5,75.2 | 14.45,75.62 14.64,75.28 v14.5,75.2
N$41  (via drill 0.35)
  Top 0.283: HDMI1.P$15 12.15,104.25 12.2,104.2 | 12.2,104.2 v12.5,103.9 | U1.37 38.05,38.45 36.91,39.59 36.91,43.37 37.69,44.16 37.69,58.32 13.3,82.71 13.3,94.38 | 13.3,94.38 v13.3,94.8 | v13.3,94.8 12.88,94.8 | 12.88,94.8 12.5,94.8 R3.1 | 12.2,104.2 12.35,103.84 v12.5,103.9 | 12.2,104.2 12.56,104.05 v12.5,103.9 | 13.3,94.38 13.45,94.74 v13.3,94.8 | 13.3,94.38 13.15,94.74 v13.3,94.8 | 12.88,94.8 13.24,94.65 v13.3,94.8 | 12.88,94.8 13.24,94.95 v13.3,94.8
  Bottom 0.283: v12.5,103.9 12.8,103.6 | 12.8,103.6 13.3,103.1 13.3,95.22 | 13.3,95.22 v13.3,94.8 | 12.8,103.6 12.65,103.96 v12.5,103.9 | 12.8,103.6 12.44,103.75 v12.5,103.9 | 13.3,95.22 13.15,94.86 v13.3,94.8 | 13.3,95.22 13.45,94.86 v13.3,94.8
N$42
  Top 0.283: HDMI1.P$16 35.51,104.75 48.87,91.39 48.87,40.64 46.17,37.95 U1.36
N$43  (via drill 0.35)
  Top 0.283: HDMIOUT.P$16 10.85,12.25 10.9,12.3 | 10.9,12.3 v11.2,12.6 | v37,30.5 36.74,30.5 36.6,30.63 | 36.6,30.63 36.05,31.19 U1.30 | 10.9,12.3 11.26,12.45 v11.2,12.6 | 10.9,12.3 11.05,12.66 v11.2,12.6 | 36.6,30.63 36.9,30.38 v37,30.5 | 36.6,30.63 36.99,30.66 v37,30.5
  Bottom 0.283: v11.2,12.6 11.2,12.18 | 11.2,12.18 11.2,4.3 12.7,2.8 25.7,2.8 31.6,8.7 31.6,22.1 32.5,23 | R6.1 33.86,23 32.5,23 | 32.5,23 35.55,26.05 35.55,29.05 36.7,30.2 | 36.7,30.2 v37,30.5 | 11.2,12.18 11.35,12.54 v11.2,12.6 | 11.2,12.18 11.05,12.54 v11.2,12.6 | 36.7,30.2 37.06,30.35 v37,30.5 | 36.7,30.2 36.85,30.56 v37,30.5
N$44  (via drill 0.35)
  Top 0.283: HDMIOUT.P$15 11.35,11.75 11.6,12 | 11.6,12 v11.9,12.3 | v35.5,30.8 35.55,30.85 35.55,31.22 | 35.55,31.22 U1.29 | 11.6,12 11.96,12.15 v11.9,12.3 | 11.6,12 11.75,12.36 v11.9,12.3 | 35.55,31.22 35.36,30.88 v35.5,30.8 | 35.55,31.22 35.65,30.84 v35.5,30.8
  Bottom 0.283: v11.9,12.3 11.9,11.88 | 11.9,11.88 11.9,4.9 12.9,3.9 24.4,3.9 30.6,10.1 30.6,24 | 30.6,24 30.6,25.9 35.2,30.5 | 35.2,30.5 v35.5,30.8 | R5.1 30.63,24.03 30.6,24 | 11.9,11.88 12.05,12.24 v11.9,12.3 | 11.9,11.88 11.75,12.24 v11.9,12.3 | 35.2,30.5 35.56,30.65 v35.5,30.8 | 35.2,30.5 35.35,30.86 v35.5,30.8
N$45
  Top 0.283: U1.16 25.2,36.45 24.88,36.12 24.88,35.02 R1.2
N$50
  Top 0.61: IC1.6 122.94,129.84 128.5,135.4
  pour Top: 128,134.7 128,147.9 131.7,147.9 131.7,134.7
N$51  (via drill 0.65)
  Top 0.61: IC1.5 117.42,128.57 | 117.42,128.57 118.17,128.57 v118.2,128.6 | 119.7,145.15 SEL_H2.1 | 119.7,136.65 SEL_H2.2 | 117.42,128.57 118.16,128.42 v118.2,128.6 | 117.42,128.57 118.15,128.78 v118.2,128.6
  Bottom 0.61: v118.2,128.6 118.75,129.15 | 118.75,129.15 121.7,132.1 121.7,134.83 | v121.6,135.6 121.7,135.5 121.7,134.83 | v118.2,128.6 118.98,128.6 | 118.98,128.6 122.54,128.6 R9.1 | 118.75,129.15 118.11,128.76 v118.2,128.6 | 118.75,129.15 118.36,128.5 v118.2,128.6 | 118.98,128.6 118.24,128.78 v118.2,128.6 | 118.98,128.6 118.24,128.42 v118.2,128.6 | 121.7,134.83 121.78,135.58 v121.6,135.6 | 121.7,134.83 121.43,135.53 v121.6,135.6
  pour Top: 118.6,134.7 118.6,147.9 122.3,147.9 122.3,134.7
N$52  (via drill 0.65)
  Top 0.61: IC1.3 108.38,129.84 | 108.38,129.84 107.64,129.84 v107.6,129.8 | 108.38,129.84 107.63,129.98 v107.6,129.8 | 108.38,129.84 107.65,129.62 v107.6,129.8
  Bottom 0.61: 107.05,130.35 106.6,130.8 | 106.6,130.8 106.6,133.2 108.3,134.9 109.5,134.9 110.12,135.52 | 110.12,135.52 110.5,135.9 v110.5,136.2 | v107.6,129.8 107.05,130.35 | 106.6,130.8 104.45,132.95 R10.1 | 107.05,130.35 107.44,129.71 v107.6,129.8 | 107.05,130.35 107.69,129.96 v107.6,129.8 | 110.12,135.52 110.63,136.08 v110.5,136.2 | 110.12,135.52 110.32,136.25 v110.5,136.2
  pour Top: 107.6,135.6 107.6,148.8 111.3,148.8 111.3,135.6
S1  (via drill 1.27)
  Top 0.283: U1.32 37.05,32.7 37.55,32.2 41.98,32.2 | v43.5,32.1 43.4,32.2 41.98,32.2 | 41.98,32.2 43.02,31.44 v43.5,32.1 | 41.98,32.2 43.11,32.81 v43.5,32.1
  Top 0.61: v110.4,125.1 109.32,126.18 | 109.32,126.18 108.7,126.8 107.2,126.8 106.6,127.4 106.6,128.2 107,128.6 110.22,128.6 IC1.4 | 109.32,126.18 109.79,124.88 v110.4,125.1 | 109.32,126.18 110.62,125.71 v110.4,125.1
  Route15 1.27: v43.5,32.1 52.9,32.1 55.7,34.9 92.91,34.9 arc93 109.9,52.7 109.9,123.1 110.4,123.6 v110.4,125.1
S2  (via drill 1.27)
  Top 0.283: U1.33 42.25,36.45 42.72,35.98 | 42.72,35.98 v43.8,34.9 | 42.72,35.98 43.01,34.72 v43.8,34.9 | 42.72,35.98 43.98,35.69 v43.8,34.9
  Top 0.61: v107.8,125.1 107.2,125.1 106.47,125.83 | 106.47,125.83 103.1,129.2 103.1,129.6 104.6,131.1 110.23,131.1 IC1.2 | 106.47,125.83 107.28,124.72 v107.8,125.1 | 106.47,125.83 107.84,125.75 v107.8,125.1
  Route15 1.27: v43.8,34.9 52.6,34.9 54.7,37 91.27,37 arc92 107.8,54.13 v107.8,125.1
VCC  (via drill 0.35, 0.65, 1.27)  (9 unrouted)
  Top 0.203: SEL_EQ.2 79.42,145.4 | 79.42,145.4 v79,145.4 | 79.42,145.4 79.09,145.57 v79,145.4 | 79.42,145.4 79.09,145.22 v79,145.4
  Top 0.254: v23.3,144.9 23.4,145 23.71,145 | 23.71,145 C1.1 | 23.71,145 23.33,145.07 v23.3,144.9 | 23.71,145 23.41,144.76 v23.3,144.9
  Top 0.283: v34.1,44.4 34.05,44.45 34.05,44.82 | 34.05,44.82 U1.55 | U1.61 31.05,44.82 | 31.05,44.82 31.05,44.45 v31,44.4 | U1.6 28.68,41.45 | 28.68,41.45 29.05,41.45 v29.1,41.4 | U1.12 28.68,38.45 | 28.68,38.45 29.05,38.45 v29.1,38.4 | U1.19 30.55,35.58 | 30.55,35.58 30.55,35.95 v30.6,36 | U1.25 33.55,35.58 | 33.55,35.58 33.55,35.95 v33.6,36 | U1.40 37.92,39.95 | 37.92,39.95 37.55,39.95 v37.5,39.9 | 37.92,42.95 U1.46 38.95,42.93 | 37.92,42.95 37.55,42.95 v37.5,42.9 | C12.1 82.9,130.18 | 82.9,130.18 v82.9,130.6 | C11.+ 86.8,130.98 | 86.8,130.98 v86.8,131.4 | 34.05,44.82 33.95,44.44 v34.1,44.4 | 34.05,44.82 34.24,44.48 v34.1,44.4 | 31.05,44.82 30.86,44.48 v31,44.4 | 31.05,44.82 31.15,44.44 v31,44.4 | 28.68,41.45 29.02,41.26 v29.1,41.4 | 28.68,41.45 29.06,41.55 v29.1,41.4 | 28.68,38.45 29.02,38.26 v29.1,38.4 | 28.68,38.45 29.06,38.55 v29.1,38.4 | 30.55,35.58 30.74,35.92 v30.6,36 | 30.55,35.58 30.45,35.96 v30.6,36 | 33.55,35.58 33.74,35.92 v33.6,36 | 33.55,35.58 33.45,35.96 v33.6,36 | 37.92,39.95 37.54,40.05 v37.5,39.9 | 37.92,39.95 37.58,39.76 v37.5,39.9 | 37.92,42.95 37.54,43.05 v37.5,42.9 | 37.92,42.95 37.58,42.76 v37.5,42.9 | 82.9,130.18 83.05,130.54 v82.9,130.6 | 82.9,130.18 82.75,130.54 v82.9,130.6 | 86.8,130.98 86.95,131.34 v86.8,131.4 | 86.8,130.98 86.65,131.34 v86.8,131.4
  Top 0.61: v107.8,132.4 108.58,132.4 | 108.58,132.4 110.23,132.4 IC1.1 | R8.2 134.52,146.14 | 134.52,146.14 135.26,146.14 v135.3,146.1 | C2.+ 22.98,146.5 | 22.98,146.5 v22.2,146.5 | 108.58,132.4 107.84,132.58 v107.8,132.4 | 108.58,132.4 107.84,132.22 v107.8,132.4 | 134.52,146.14 135.25,145.93 v135.3,146.1 | 134.52,146.14 135.27,146.28 v135.3,146.1 | 22.98,146.5 22.24,146.68 v22.2,146.5 | 22.98,146.5 22.24,146.32 v22.2,146.5
  Route15 2.54: v54.2,45 88,45 arc94 99.6,57.49 v99.6,125 | v54.2,29 93.9,29 arc94 115.7,52.29 v115.7,125
  Bottom 0.283: C3.1 31,43.9 31,43.98 | 31,43.98 v31,44.4 | v29.1,41.4 29.52,41.4 | 29.52,41.4 30.06,41.4 C4.1 | v29.1,38.4 29.52,38.4 | 29.52,38.4 30.08,38.4 C5.1 | v30.6,36 30.9,36.3 | 30.9,36.3 31.73,37.13 C6.1 | v33.6,36 33.6,36.34 33.67,36.41 | 33.67,36.41 C7.1 | R6.2 36.19,26.98 | 36.19,26.98 v36.19,27.39 v36.2,27.4 | R5.2 31.67,25.6 | 31.67,25.6 31.67,25.87 v31.8,26 | 31,43.98 31.15,44.34 v31,44.4 | 31,43.98 30.85,44.34 v31,44.4 | 29.52,41.4 29.16,41.55 v29.1,41.4 | 29.52,41.4 29.16,41.25 v29.1,41.4 | 29.52,38.4 29.16,38.55 v29.1,38.4 | 29.52,38.4 29.16,38.25 v29.1,38.4 | 30.9,36.3 30.54,36.15 v30.6,36 | 30.9,36.3 30.75,35.94 v30.6,36 | 33.67,36.41 33.47,36.09 v33.6,36 | 33.67,36.41 33.76,36.03 v33.6,36 | 36.19,26.98 36.34,27.34 v36.2,27.4 | 36.19,26.98 36.05,27.34 v36.2,27.4 | 31.67,25.6 31.92,25.9 v31.8,26 | 31.67,25.6 31.64,25.99 v31.8,26
  Bottom 0.61: R10.2 102.45,133 101.18,133 | 101.18,133 v100.4,133 | R9.2 117.14,125.49 | 117.14,125.49 116.19,125.49 v115.7,125 | 117.14,125.49 115.77,125.64 v115.7,125 | 117.14,125.49 116.15,124.53 v115.7,125 | 101.18,133 100.44,133.18 v100.4,133 | 101.18,133 100.44,132.82 v100.4,133
  other vias: 28.6,142 30.8,142 30.8,140.2 30.8,138.1 28.5,138 28.5,140.1
  pour Route15: 0,0 57.2,0 57.2,150 0,150
  pour Route15: 72.7,150 72.7,122 142.7,122 142.7,150
(copper drawn outside any net)
  shapes: Top area x5

## Text on the board
Top: 1
Route2: 2
Route15: 3
Bottom: 4
Document: Buildup: / Layer Material Thickness / 1 Copper 0.018mm / - Prepreg 0.36mm / 2 Copper 0.018mm / - Core 0.71mm / 3 Copper 0.035mm / - Prepreg 0.2mm / 4 Copper 0.018mm / / Outlines of rigid and flex parts in / layers 114 and 113 respectively.